# Altium PCB edgy.PcbDoc
Units mm, origin at the board's own origin, x right, y up, seen from the top; angles counter-clockwise.
Board outline 50 x 50 mm, 4 copper layers (Top Layer, Signal Layer 1, Signal Layer 2, Bottom Layer), stack 1.505 mm thick; 76 components, 70 nets, 366 pads, 109 vias.
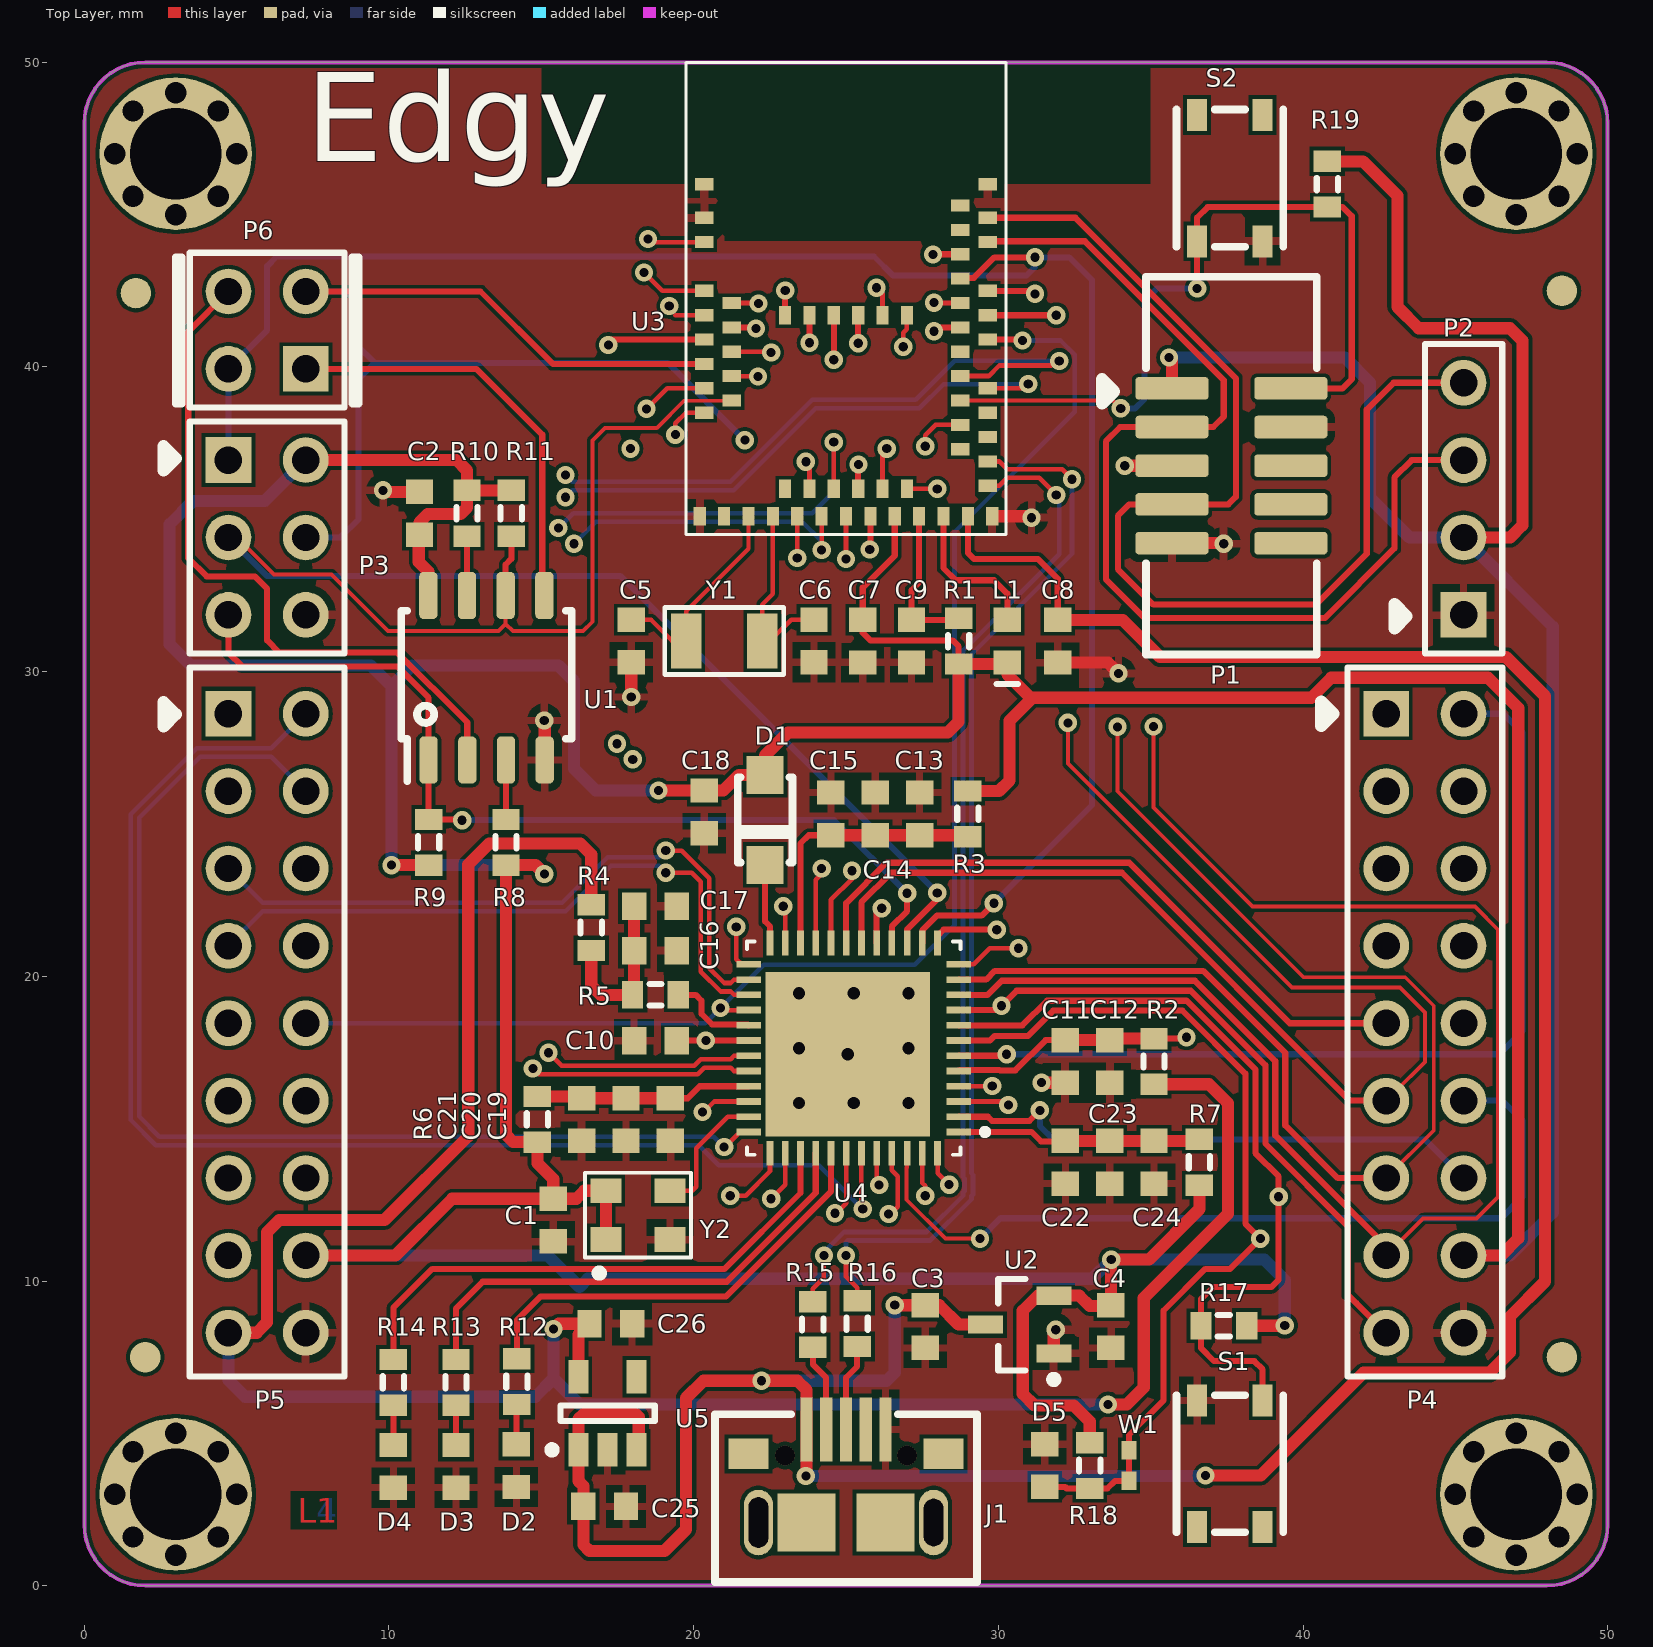
[diagram p0: Top Layer view]
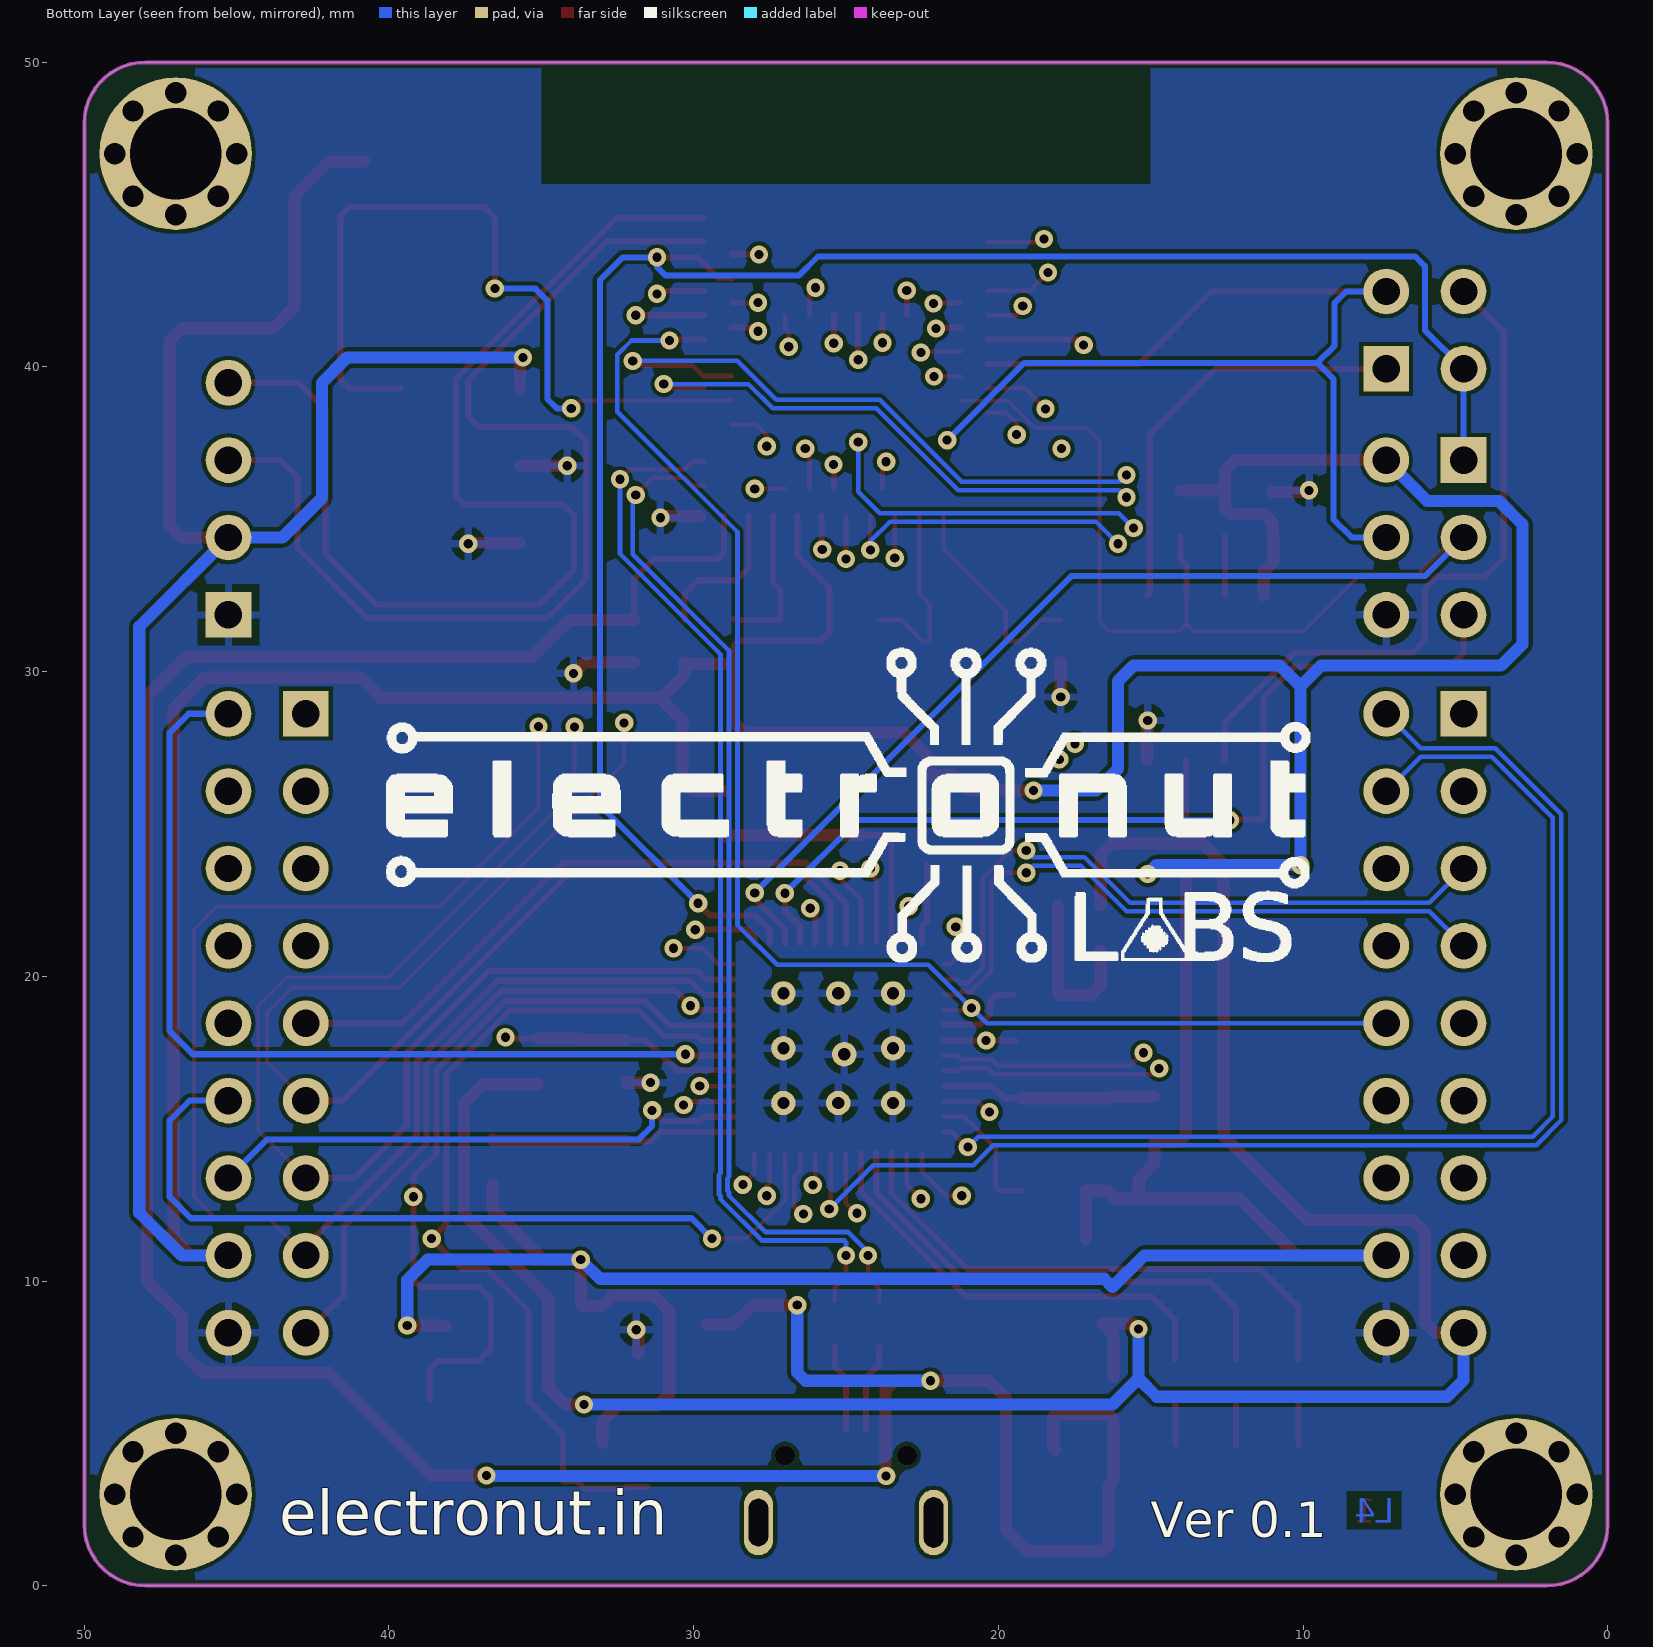
[diagram p1: Bottom Layer view, seen from below]
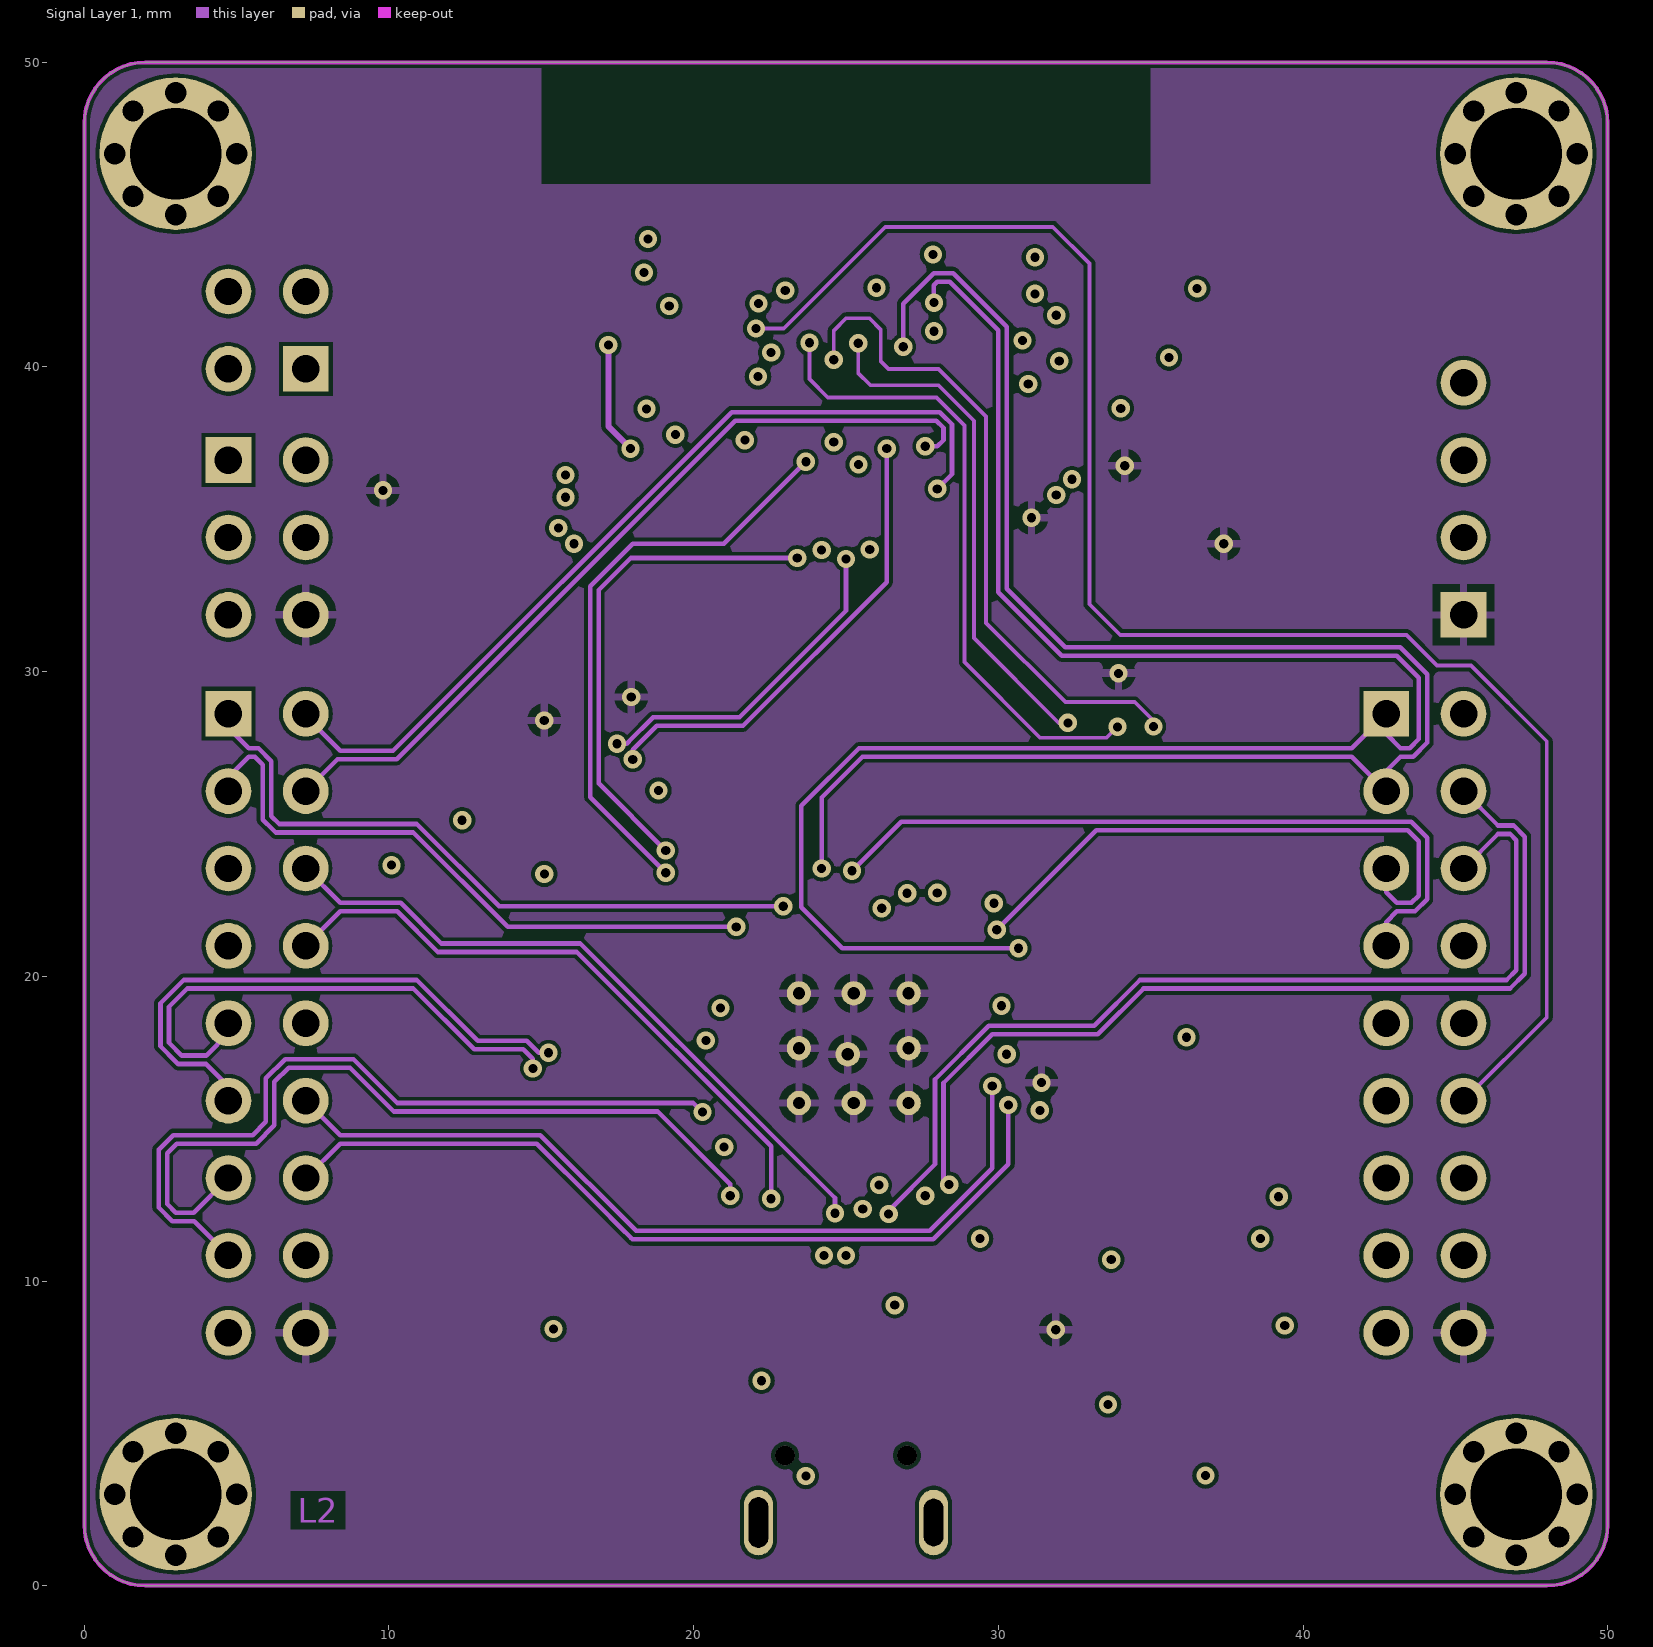
[diagram p2: Signal Layer 1]
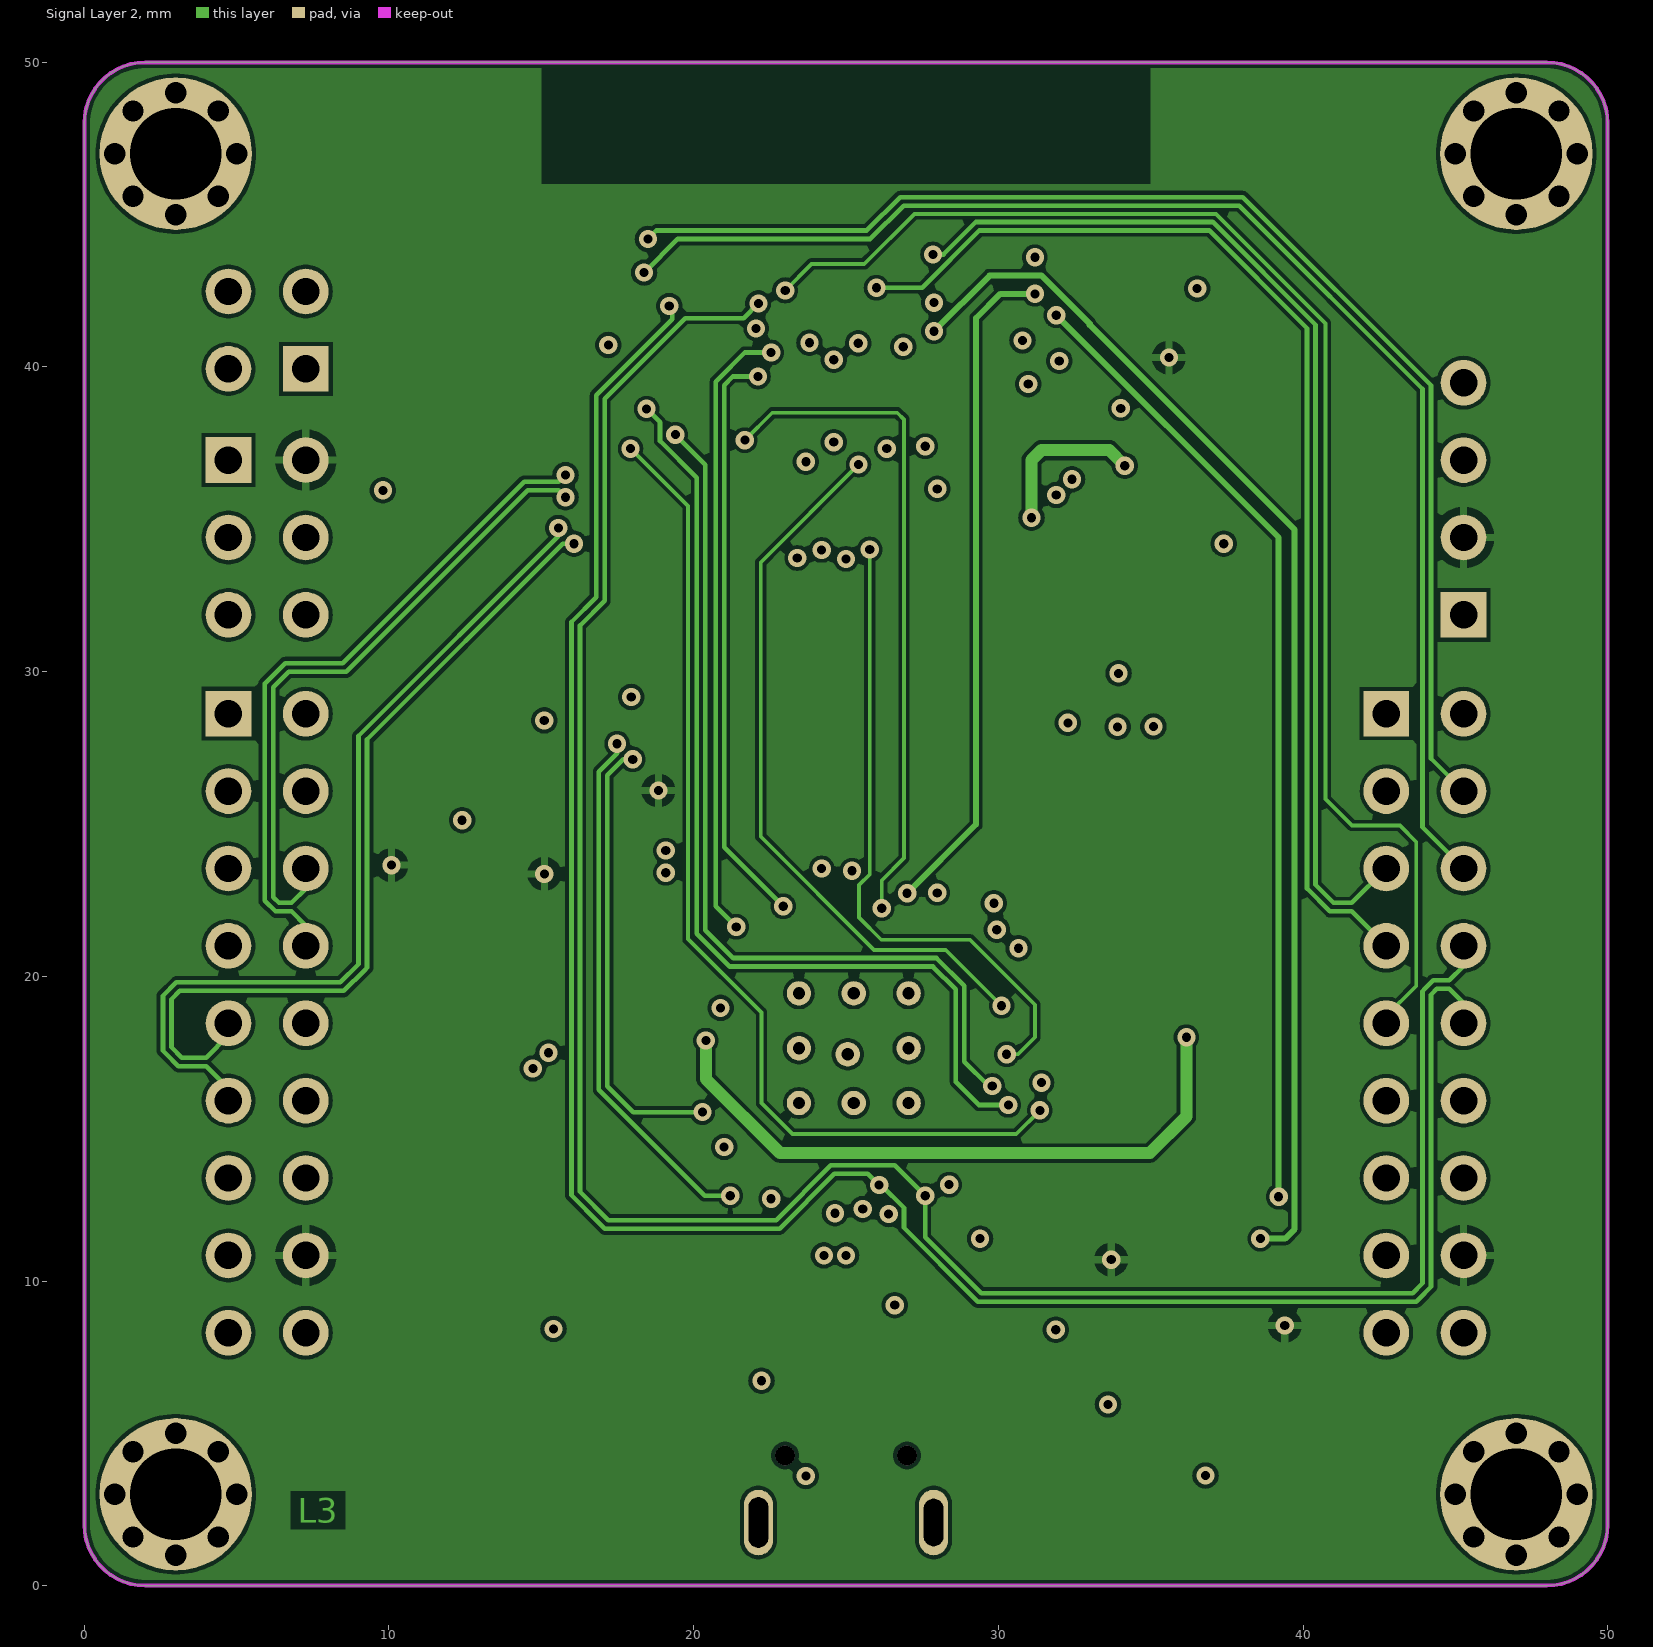
[diagram p3: Signal Layer 2]

## Layer stack, top to bottom
Top Solder: solder mask 0.0475, Solder Resist, Dk 3.5
Top Layer: signal copper 0.0175
Dielectric 1: core 0.1, FR-4, Dk 4.2
Signal Layer 1: signal copper 0.035
Dielectric 3: prepreg 1.2, Dk 4.2
Signal Layer 2: signal copper 0.035
Dielectric 2: core 0.1, Dk 4.2
Bottom Layer: signal copper 0.0175
Bottom Solder: solder mask 0.0475, Solder Resist, Dk 3.5

## Board outline
0,2 0,48 cw(c2,48) 2,50 48,50 cw(c48,48) 50,48 50,2 cw(c48,2) 48,0 2,0 cw(c2,2)

## Design rules (kind name [scope] priority, off if disabled: settings)
Clearance poly_clearance [(InNamedPolygon('TOP_LAYER-GND')) or (InNamedPolygon('BOTTOM_LAYER-GND'))] p1: gap=0.254 ignorepadtopadclearanceinfootprint=FALSE
Clearance Diff_clearance [(InDifferentialPairClass('All Differential Pairs'))] p2: gap=0.127 ignorepadtopadclearanceinfootprint=FALSE
Clearance [All] p3: gap=0.127 ignorepadtopadclearanceinfootprint=FALSE
DiffPairsRouting [InDifferentialPairClass('All Differential Pairs')] p1: maxlimit=0.127 minlimit=0.127 mostfreqgap=0.127 toplayer_minwidth=0.152 toplayer_maxwidth=0.152 toplayer_prefwidth=0.152 midlayer1_minwidth=0.152 midlayer1_maxwidth=0.152 midlayer1_prefwidth=0.152 midlayer2_minwidth=0.152 midlayer2_maxwidth=0.152 midlayer2_prefwidth=0.152 bottomlayer_minwidth=0.152 bottomlayer_maxwidth=0.152 bottomlayer_prefwidth=0.152 maxuncoupledlength=12.7
HoleSize [All] p1: absolutevalues=TRUE maxlimit=5 minlimit=0.025 maxpercent=80.000 minpercent=20.000
MinimumSolderMaskSliver [All] p1: minsoldermaskwidth=0.01
PolygonConnect [All] p1: connectstyle=Relief reliefconductorwidth=0.254 reliefentries=4 polygonreliefangle="90 Angle" airgapwidth=0.254
RoutingVias [All] p1: holewidth=0.3 width=0.6 viastyle="Through Hole" minholewidth=0.3 minwidth=0.6 maxholewidth=0.3 maxwidth=0.6
SilkToSilkClearance [All] p1: silktosilkclearance=0.05
SilkToSolderMaskClearance [IsPad] p1: minsilkscreentomaskgap=0.01 clearancetoexposedcopper=TRUE
SolderMaskExpansion [All] p1: expansion=0.102
Width Diff_pair_width [InNetClass('diff_pair')] p1: maxlimit=0.152 minlimit=0.152 preferedwidth=0.152
Width [All] p2: maxlimit=0.4 minlimit=0.127 preferedwidth=0.2
25 further rules are at their usual default settings.

## Classes and differential pairs
component class Sheet2-edgy: C1 C2 C10 C11 C12 C13 C14 C15 C16 C17 C18 C19 C20 C21 C22 C23 C24 D1 D2 D3 D4 D5 P5 P6 R2 R3 R4 R5 R6 R7 R8 R9 R10 R11 R12 R13 R14 R17 R18 S1 U1 U4 W1 Y2
component class Sheet1-edgy: C3 C4 C5 C6 C7 C8 C9 C25 C26 J1 L1 P1 P2 P3 P4 R1 R15 R16 R19 S2 U2 U3 U5 Y1
differential pair B1-Diff2: +B1-Diff2_P -B1-Diff2_N
differential pair B2-Diff3: +B2-Diff3_P -B2-Diff3_N
differential pair B2-Diff2: +B2-Diff2_P -B2-Diff2_N
differential pair B2-Diff1: +B2-Diff1_P -B2-Diff1_N
differential pair B1-Diff1: +B1-Diff1_P -B1-Diff1_N
differential pair B0-Diff6: +B0-Diff6_P -B0-Diff6_N
differential pair B0-Diff5: +B0-Diff5_P -B0-Diff5_N
differential pair B0-Diff4: +B0-Diff4_P -B0-Diff4_N
differential pair B0-Diff3: +B0-Diff3_P -B0-Diff3_N
differential pair B0-Diff2: +B0-Diff2_P -B0-Diff2_N
differential pair B0-Diff1: +B0-Diff1_P -B0-Diff1_N
differential pair USB: +USB_P -USB_N

## Components (designator, comment, footprint, x,y, rotation, side; value= is the part's Value field where it differs from the comment)
C1 "0.1uF" 1608[0603] 15.388,12 r90 top
C2 "0.1uF" 1608[0603] 11,35.2 r270 top
C3 "1uF" 1608[0603] 27.6,8.504 r90 top
C4 "2.2uF" 1608[0603] 33.694,8.504 r90 top
C5 "12pF" 1608[0603] 17.95,31.006 r90 top
C6 "12pF" 1608[0603] 23.95,31.006 r90 top
C7 "10uF" 1608[0603] 25.55,31 r90 top
C8 "10uF" 1608[0603] 31.95,31 r90 top
C9 "10uF" 1608[0603] 27.15,31 r90 top
C10 "1uF" 1608[0603] 18.744,17.892 r0 top
C11 "0.1uF" 1608[0603] 32.2,17.206 r90 top
C12 "10nF" 1608[0603] 33.654,17.206 r90 top
C13 "1uF" 1608[0603] 27.415,25.332 r270 top
C14 "0.1uF" 1608[0603] 25.96,25.332 r270 top
C15 "10nF" 1608[0603] 24.506,25.332 r270 top
C16 "10uF" 1608[0603] 18.744,20.846 r180 top
C17 "0.1uF" 1608[0603] 18.744,22.301 r180 top
C18 "0.1uF" 1608[0603] 20.344,25.4 r270 top
C19 "1uF" 1608[0603] 19.238,15.298 r90 top
C20 "0.1uF" 1608[0603] 17.779,15.298 r90 top
C21 "10nF" 1608[0603] 16.325,15.298 r90 top
C22 "1uF" 1608[0603] 32.202,13.898 r90 top
C23 "0.1uF" 1608[0603] 33.656,13.898 r90 top
C24 "10nF" 1608[0603] 35.111,13.898 r90 top
C25 "2.2uF" 1608[0603] 17.079,2.6 r180 top
C26 "2.2uF" 1608[0603] 17.279,8.6 r180 top
D1 "MBR130" SOD_123 22.344,25.135 r270 top
D2 "LED1" 1608[0603] 14.182,3.941 r270 top
D3 "LED2" 1608[0603] 12.2,3.919 r270 top
D4 "LED3" 1608[0603] 10.146,3.919 r270 top
D5 "LED4" 1608[0603] 31.523,3.941 r90 top
J1 "Micro_USB" Micro_USB 25,3.598 r0 top
L1 "10uH" INDC1608L 30.296,31 r90 top
P1 "Header 5X2" 2X5_1.27MM_PITCH_HEADER 37.65,36.76 r0 top
P2 "SWD Header" 4pin_2.54mm_header 45.27,35.674 r0 top
P3 "GPIO" "2X9_2.54MM PITCH_HEADER" 6,18.46 r0 top
P4 "GPIO" "2X9_2.54MM PITCH_HEADER" 44,18.46 r0 top
P5 "SPI Prog" 2x3_2.54mm_pitch_header 6,34.404 r0 top
P6 "SPI" 2x2_2.54mm_pitch_header 6,41.209 r180 top
R1 "0R" J1-0603 28.696,31 r270 top
R2 "0R" J1-0603 35.109,17.206 r90 top
R3 "0R" J1-0603 29,25.332 r270 top
R4 "0R" J1-0603 16.64,21.6 r270 top
R5 "100" J1-0603 18.744,19.392 r0 top
R6 "0r" J1-0603 14.87,15.308 r90 top
R7 "0R" J1-0603 36.6,13.898 r90 top
R8 "10K" J1-0603 13.84,24.4 r90 top
R9 "10K" J1-0603 11.3,24.4 r90 top
R10 "10K" J1-0603 12.56,35.2 r270 top
R11 "10K" J1-0603 14.014,35.2 r270 top
R12 "1K" J1-0603 14.2,6.695 r90 top
R13 "1K" J1-0603 12.2,6.673 r90 top
R14 "1K" J1-0603 10.146,6.673 r90 top
R15 "27R" J1-0603 23.911,8.574 r270 top
R16 "27R" J1-0603 25.365,8.6 r270 top
R17 "10K" J1-0603 37.4,8.534 r0 top
R18 "2K2" J1-0603 33,3.941 r270 top
R19 "10K" J1-0603 40.8,46 r90 top
S1 "SW-PB" Tact_Switch 37.6,4 r270 top
S2 "SW-PB" Tact_Switch 37.6,46.2 r90 top
U1 "W25Q_XX" SOIC-8_3.9X4.9MM_PITCH1.27MM 13.2,29.8 r90 top
U2 "MCP1702" SOT-23 30.8,8.6 r180 top
U3 "MODULE_MDBT50" PCB_MDBT50_10.5X15.5 25,40.55 r0 top
U4 "ICE40UP5K-SG48ITR50" *QFN50P700X700X100-49N_ICE40UP5K-SG48ITR50(PRIMARY) 25.256,17.642 r180 top
U5 "MCP1812AT-012/OT" SOT23-5BN 17.174,5.659 r90 top
W1 "Jumper" 0402 34.289,3.941 r270 top
Y1 "32.768kHz" 32.768kHz_crystal 22.25,31.006 r180 top
Y2 "SIT1602AC-12-33E-12.000000E" *OSCDFN320X250X80-4N 18.171,12.164 r0 top
? "Comment" FIDUCIAL-1MM#1 1.5,42.5 r0 top
? "Comment" FIDUCIAL-1MM#2 1.5,7.14 r0 top
? "Comment" FIDUCIAL-1MM#3 48.5,7.5 r0 top
? "Comment" FIDUCIAL-1MM#3 48.5,42.5 r0 top
? "Comment" "MOUNTING_HOLES 3MM" 3,3 r0 top
? "Comment" "MOUNTING_HOLES 3MM" 47,3 r0 top
? "Comment" "MOUNTING_HOLES 3MM" 47,47 r0 top
? "Comment" "MOUNTING_HOLES 3MM" 3,47 r0 top

## Footprints (in the part's own frame and the unit in brackets; to place one, negate y for a bottom-side part, rotate by r counter-clockwise, add the part's x,y. Pads: shape width x height; smd on the part's side, far side on the other; paste and mask are expansions set on the pad)
2x2_2.54mm_pitch_header [mm]
  rect 1.5x1.5 hole 0.9: 1(-1.27,1.27)
  round 1.5 hole 0.9: 2(1.27,1.27) 3(-1.27,-1.27) 4(1.27,-1.27)
  silkscreen extent -2.54,-2.54 2.54,2.54
2x3_2.54mm_pitch_header [mm]
  rect 1.5x1.5 hole 0.9: 1(-1.27,2.54)
  round 1.5 hole 0.9: 2(1.27,2.54) 3(-1.27,0) 4(1.27,0) 5(-1.27,-2.54) 6(1.27,-2.54)
  silkscreen extent -2.54,-3.81 2.54,3.81
2X5_1.27MM_PITCH_HEADER [mm]
  rrect30% 2.4x0.74 smd: 1(-1.95,2.54) 2(-1.95,1.27) 3(-1.95,0) 4(-1.95,-1.27) 5(-1.95,-2.54) 6(1.95,-2.54) 7(1.95,-1.27) 8(1.95,0) 9(1.95,1.27) 10(1.95,2.54)
  silkscreen extent -2.8,-6.2 2.8,6.2, body extent -2.75,-6.33 2.75,6.32, height 5.4
"2X9_2.54MM PITCH_HEADER" [mm]
  rect 1.5x1.5 hole 0.9: 1(-1.27,10.16)
  round 1.5 hole 0.9: 2(1.27,10.16) 3(-1.27,7.62) 4(1.27,7.62) 5(-1.27,5.08) 6(1.27,5.08) 7(-1.27,2.54) 8(1.27,2.54) 9(-1.27,0) 10(1.27,0) 11(-1.27,-2.54) 12(1.27,-2.54) 13(-1.27,-5.08) 14(1.27,-5.08) 15(-1.27,-7.62) 16(1.27,-7.62) 17(-1.27,-10.16) 18(1.27,-10.16)
  silkscreen extent -2.54,-11.6 2.54,11.68, body extent -2.5,-11.68 2.5,11.68, height 8.5
4pin_2.54mm_header [mm]
  rect 1.5x1.5 hole 0.9: 1(0,-3.81)
  round 1.5 hole 0.9: 2(0,-1.27) 3(0,1.27) 4(0,3.81)
  silkscreen extent -1.27,-5.08 1.27,5.08
32.768kHz_crystal [mm]
  rect 1x1.8 smd: 1(0,0) 2(2.5,0)
  silkscreen extent -0.7,-1.1 3.2,1.1, body extent -0.2,-0.7 2.7,0.7, height 0.25
0402 [mm] "Chip Capacitor, Body 1.0x0.5mm, IPC High Density"
  rect 0.6x0.5 smd: 1(-0.5,0) 2(0.5,0)
  body extent -0.55,-0.3 0.55,0.3, height 1.3
1608[0603] [mm] "Chip Capacitor, Body 1.6x0.8mm, IPC High Density"
  rect 0.8x0.9 smd: 1(-0.7,0) 2(0.7,0)
  body extent -0.87,-0.48 0.87,0.48, height 1.3
*OSCDFN320X250X80-4N [mm]
  rect 1.01x0.81 smd: 1(-1.05,-0.8) 2(1.05,-0.8) 3(1.05,0.8) 4(-1.05,0.8)
  silkscreen extent -1.74,-1.95 1.74,1.39, body extent -1.5,-1 1.5,1, height 0.75
*QFN50P700X700X100-49N_ICE40UP5K-SG48ITR50(PRIMARY) [mm]
  rect 0.81x0.22 smd: 1(-3.45,2.75) 2(-3.45,2.25) 3(-3.45,1.75) 4(-3.45,1.25) 5(-3.45,0.75) 6(-3.45,0.25) 7(-3.45,-0.25) 8(-3.45,-0.75) 9(-3.45,-1.25) 10(-3.45,-1.75) 11(-3.45,-2.25) 12(-3.45,-2.75) 25(3.45,-2.75) 26(3.45,-2.25) 27(3.45,-1.75) 28(3.45,-1.25) 29(3.45,-0.75) 30(3.45,-0.25) 31(3.45,0.25) 32(3.45,0.75) 33(3.45,1.25) 34(3.45,1.75) 35(3.45,2.25) 36(3.45,2.75)
  rect 0.22x0.81 smd: 13(-2.75,-3.45) 14(-2.25,-3.45) 15(-1.75,-3.45) 16(-1.25,-3.45) 17(-0.75,-3.45) 18(-0.25,-3.45) 19(0.25,-3.45) 20(0.75,-3.45) 21(1.25,-3.45) 22(1.75,-3.45) 23(2.25,-3.45) 24(2.75,-3.45) 37(2.75,3.45) 38(2.25,3.45) 39(1.75,3.45) 40(1.25,3.45) 41(0.75,3.45) 42(0.25,3.45) 43(-0.25,3.45) 44(-0.75,3.45) 45(-1.25,3.45) 46(-1.75,3.45) 47(-2.25,3.45) 48(-2.75,3.45)
  round 0.8 hole 0.4: EP(-1.8,1.8) EP(-1.8,0) EP(-1.8,-1.8) EP(0,1.8) EP(0,-1.8) EP(0.2,0.2) EP(1.8,1.8) EP(1.8,0) EP(1.8,-1.8)
  rect 5.4x5.4 smd: EP(0.2,0.2)
  silkscreen extent -4.41,-3.5 3.5,3.5, body extent -3.5,-3.5 3.5,3.5, height 1
FIDUCIAL-1MM#1 [mm] "1MM FIDUCAL MARKER"
  round 1 smd paste+0 mask+0.5: 1(0.193,-0.073)
FIDUCIAL-1MM#2 [mm] "1MM FIDUCAL MARKER"
  round 1 smd paste+0 mask+0.5: 1(0.5,0.36)
FIDUCIAL-1MM#3 [mm] "1MM FIDUCAL MARKER"
  round 1 smd paste+0 mask+0.5: 1(0,0)
INDC1608L [mm] "Chip Inductor, Body 1.6x0.8mm, IPC High Density"
  rect 0.8x0.9 smd: 1(-0.7,0) 2(0.7,0)
  silkscreen extent -1.4,-0.35 -1.4,0.35, body extent -0.87,-0.48 0.87,0.48, height 0.55
J1-0603 [mm] "Chip Resistor, Body 1.6x0.8mm, IPC High Density"
  rect 0.7x0.9 smd: 1(-0.75,0) 2(0.75,0)
  silkscreen extent -0.2,-0.35 0.2,0.35, body extent -0.85,-0.48 0.85,0.48, height 0.9
Micro_USB [mm]
  rect 0.4x2.1 smd: 1(-1.3,1.525) 2(-0.65,1.525) 3(0,1.525) 4(0.65,1.525) 5(1.3,1.525)
  rect 1.3x1 smd: ""(-3.2,0.725) ""(3.2,0.725)
  oval 0.95x2.15 hole 0.65 slot 1.65 at 90 deg: ""(-2.875,-1.525)
  round 0.65 hole 0.65: ""(-2,0.675) ""(2,0.675)
  rect 1.9x1.9 smd: ""(-1.3,-1.525) ""(1.3,-1.525)
  oval 0.95x2.15 hole 0.65 slot 1.55 at 90 deg: ""(2.875,-1.525)
  silkscreen extent -4.3,-3.47 4.3,2.02, body extent -4.02,-3.38 4.02,2.43, height 17
"MOUNTING_HOLES 3MM" [mm]
  round 1 hole 0.7: ""(-2,0) ""(-1.4,-1.4) ""(-1.4,1.4) ""(0,-2) ""(0,2) ""(1.4,-1.4) ""(1.4,1.4) ""(2,0)
  round 5 hole 3: ""(0,0)
PCB_MDBT50_10.5X15.5 [mm]
  rect 0.6x0.4 smd mask+0.05: 1(-4.65,5.45) 2(-4.65,4.35) 3(-4.65,3.55) 4(-4.65,1.95) 5(-3.75,1.55) 6(-4.65,1.15) 7(-3.75,0.75) 8(-4.65,0.35) 9(-3.75,-0.05) 10(-4.65,-0.45) 11(-3.75,-0.85) 12(-4.65,-1.25) 13(-3.75,-1.65) 14(-4.65,-2.05) 34(4.65,-4.45) 35(4.65,-3.65) 36(3.75,-3.25) 37(4.65,-2.85) 38(3.75,-2.45) 39(4.65,-2.05) 40(3.75,-1.65) 41(4.65,-1.25) 42(3.75,-0.85) 43(3.75,-0.05) 44(4.65,0.35) 45(3.75,0.75) 46(4.65,1.15) 47(3.75,1.55) 48(4.65,1.95) 49(3.75,2.35) 50(3.75,3.15) 51(4.65,3.55) 52(3.75,3.95) 53(4.65,4.35) 54(3.75,4.75) 55(4.65,5.45)
  rect 0.4x0.6 smd mask+0.05: 15(-4.8,-5.45) 16(-4,-5.45) 17(-3.2,-5.45) 18(-2.4,-5.45) 19(-2,-4.55) 20(-1.6,-5.45) 21(-1.2,-4.55) 22(-0.8,-5.45) 23(-0.4,-4.55) 24(0,-5.45) 25(0.4,-4.55) 26(0.8,-5.45) 27(1.2,-4.55) 28(1.6,-5.45) 29(2,-4.55) 30(2.4,-5.45) 31(3.2,-5.45) 32(4,-5.45) 33(4.8,-5.45) 56(-2,1.15) 57(-1.2,1.15) 58(-0.4,1.15) 59(0.4,1.15) 60(1.2,1.15) 61(2,1.15)
  silkscreen extent -5.25,-6.05 5.25,9.45, body extent -5.25,-6.05 5.25,9.45, height 2.05
SOD_123 [mm]
  rect 1.25x1.22 smd: 1(-1.475,0) 2(1.475,0)
  silkscreen extent -1.4,-0.9 1.4,0.9, body extent -1.93,-1.05 1.93,1.1, height 1.35
SOIC-8_3.9X4.9MM_PITCH1.27MM [mm]
  rrect50% 1.55x0.6 smd: 1(-2.7,1.9) 2(-2.7,0.63) 3(-2.7,-0.64) 4(-2.7,-1.91) 5(2.7,-1.9) 6(2.7,-0.63) 7(2.7,0.64) 8(2.7,1.91)
  silkscreen extent -3.4,-2.8 2.2,2.8, body extent -3.08,-2.6 3.08,2.4, height 2
SOT23-5BN [mm] "SOT23, 5-Leads, Body 2.9x1.6mm, Pitch 0.95mm, Lead Span 2.8mm, IPC Medium Density"
  rect 1.1x0.65 smd: 1(-1.2,0.95) 2(-1.2,0) 3(-1.2,-0.95) 4(1.2,-0.95) 5(1.2,0.95)
  silkscreen extent -1.32,-1.55 0.25,1.95, body extent -0.9,-1.55 0.9,1.55, height 1.19
SOT-23 [mm]
  rect 1.15x0.6 smd: 1(-1.021,0.981) 2(-1.021,-0.919) 3(1.229,0.031)
  silkscreen extent -1.15,-1.47 0.8,1.96, body extent -0.6,-1.47 0.8,1.53, height 1.1
Tact_Switch [mm]
  rect 1.05x0.65 smd: 1(-2.075,1.075) 2(-2.075,-1.075) ""(2.075,1.075) ""(2.075,-1.075)
  silkscreen extent -2.25,-1.75 2.25,1.75, body extent -2.55,-1.62 2.55,1.63, height 2.4

## Part data
C1 C2 C3 C4 C5 C6 C7 C8 C9 C10 C11 C12 C13 C14 C15 C16 C17 C18 C19 C20 C21 C22 C23 C24 C25 C26: library part "Cap Semi", "Capacitor (Semiconductor SIM Model)", LatestRevisionDate=29-May-2009, LatestRevisionNote="IPC-7351 Footprint Added.", PackageDescription="Chip Capacitor", PackageReference=C1206, Published=8-Jun-2000, Publisher="Altium Limited"
D1: library part Diode, "Default Diode", Code_JEDEC=DO-214-AB, LatestRevisionDate=17-Jul-2002, LatestRevisionNote="Re-released for DXP Platform.", PackageDescription="DO-214-AB/SMC; 2 C-Bend Leads; Body 7.9 x 5.9 mm, inc. leads (LxW)", PackageReference=SMC, PackageVersion=Sep-1996, Published=8-Jun-2000, Publisher="Altium Limited"
D2 D3 D5: library part LED3, "Typical BLUE SiC LED", DatasheetVersion=16-Apr-2002, LatestRevisionDate=17-Dec-2003, LatestRevisionNote="PCB Footprint replaced.", PackageDescription="SM LED; 2 C-Bend Leads; Body 3.5 x 2.8 x 1.9 mm, inc leads (LxWxH typ)", PackageReference=3.5X2.8X1.9, PackageVersion=16-Apr-2002, Published=8-Jun-2000, Publisher="Altium Limited"
D4: "Typical BLUE SiC LED", DatasheetVersion=16-Apr-2002, LatestRevisionDate=17-Dec-2003, LatestRevisionNote="PCB Footprint replaced.", PackageDescription="SM LED; 2 C-Bend Leads; Body 3.5 x 2.8 x 1.9 mm, inc leads (LxWxH typ)", PackageReference=3.5X2.8X1.9, PackageVersion=16-Apr-2002, Published=8-Jun-2000, Publisher="Altium Limited"
J1: "Micro USB 2.0"
L1: library part Inductor, "Inductor", Code_IEC=1005, Code_JEITA=0402, LatestRevisionDate=29-May-2009, LatestRevisionNote="IPC-7351 Footprint Added.", PackageDescription="Chip Inductor", PackageReference=0402-A, Published=8-Jun-2000, Publisher="Altium Limited"
P1: "Header, 5-Pin, Dual row", LatestRevisionDate=17-Jul-2002, LatestRevisionNote="Re-released for DXP Platform.", Publisher="Altium Limited"
P2: library part "Header 4", "Header, 4-Pin", LatestRevisionDate=17-Jul-2002, LatestRevisionNote="Re-released for DXP Platform.", Publisher="Altium Limited"
P3 P4: library part "Header 9X2", "Header, 9-Pin, Dual row", LatestRevisionDate=17-Jul-2002, LatestRevisionNote="Re-released for DXP Platform.", Publisher="Altium Limited"
P5: library part "Header 3X2", "Header, 3-Pin, Dual row", LatestRevisionDate=17-Jul-2002, LatestRevisionNote="Re-released for DXP Platform.", Publisher="Altium Limited"
P6: library part "Header 2X2", "Header, 2-Pin, Dual row", LatestRevisionDate=17-Jul-2002, LatestRevisionNote="Re-released for DXP Platform.", Publisher="Altium Limited"
R1 R2 R3 R4 R5 R6 R7 R8 R9 R10 R11 R12 R13 R14 R15 R16 R17 R18 R19: library part Res3, "Resistor", LatestRevisionDate=29-May-2009, LatestRevisionNote="IPC-7351 Footprint Added.", PackageDescription="Chip Resistor", PackageReference=J1-0603, Published=8-Jun-2000, Publisher="Altium Limited"
S1 S2: "Switch", LatestRevisionDate=17-Jul-2002, LatestRevisionNote="Re-released for DXP Platform.", PackageDescription="Switch; 2 Leads", PackageReference=SPST-2, Published=24-Mar-1999, Publisher="Altium Limited"
U2: "3.3 V Low Quasient Current LDO"
U3: "MDBT50"
U4: "iCE40 UltraPlus 5280 LUTs 39 I/O 1.2 V Surface Mount FOPGA - QFN-48", Package="QFN-48 Lattice Semiconductor", Digi-Key_Part_Number=220-2145-1-ND, Digi-Key_Purchase_URL=https://www.digikey.in/product-detail/en/lattice-semiconductor-corporation/ICE40UP5K-SG48ITR50/220-2145-1-ND/7688199?utm_source=snapeda&utm_medium=aggregator&utm_campaign=symbol, MF="Lattice Semiconductor", MP=ICE40UP5K-SG48ITR50, SnapEDA_Link=https://www.snapeda.com/parts/ICE40UP5K-SG48ITR50/Lattice%20Semiconductor%20Corporation/view-part/?ref=snap
U5: Manufacturer=Microchip, Supplier Part Number 1=579-MCP1812AT-012/OT, Manufacturer Part Number=MCP1812AT-012/OT, Pricing 1="1=0.4, 10=0.395, 50=0.329, 100=0.298, 1000=0.298, 10000=0.298 (USD)", Stock 1=2995, Supplier 1=Mouser
W1: "Jumper Wire", LatestRevisionDate=17-Jul-2002, LatestRevisionNote="Re-released for DXP Platform.", PackageDescription="Radial Cap, Thru-Hole; 2 Leads; 0.2 in Pin Spacing", PackageReference=RAD-0.2, Published=24-Mar-1999, Publisher="Altium Limited"
Y1: library part XTAL, "Crystal Oscillator", LatestRevisionDate=17-Jul-2002, LatestRevisionNote="Re-released for DXP Platform.", PackageDescription="Crystal, Thru-Hole; 2 Leads; Body 3.1 x 8.2 mm (Dia.xH)", PackageReference=R38, Published=8-Jun-2000, Publisher="Altium Limited"
Y2: Case/Package=SMD/SMT, Manufacturer=SiTime, Supplier Part Number 1=SIT1602AC-12-33E-12.000000E-ND, Height=0.032inch, Length=0.098inch, Manufacturer Part Number=SIT1602AC-12-33E-12.000000E, Mount="Surface Mount", Packaging="Tape and Reel", Pricing 1="1000=0.63648 (USD)", Stock 1=0, Supplier 1=Digi-Key, Width=0.079inch

## Via types
v1: diameter 0.6, hole 0.3, Top Layer to Bottom Layer, tented both sides, 109 vias

## Nets (pads, with @x,y where several pads share a name; then routed paths per layer and width w, separated by ;. In a path a pad name is that pad's centre, name@x,y a point inside that pad or via, vN(x,y) a via of type N, cw(c..) or ccw(c..) an arc to the next point about the centre after c; other vN are vias at no path point)
+1.2V: C26.2 P3.17 R2.1 R4.1 U5.5 | length 77.9
  Top Layer w0.4: P3.17 5.656,8.3 6,8.644 6,11.6 6.4,12 9.85,12 12.6,14.75 12.6,23.672 13.289,24.361 16.278,24.361 16.64,24 R4.1 ; v1(15.4,8.427) 15.573,8.6 C26.2 16.224,8.245 U5.5 ; v1(33.6,5.948) 34.216,5.948 34.773,6.505 34.773,9.444 37.534,12.205 37.534,15.833 36.911,16.456 R2.1
  Bottom Layer w0.4: P3.17 4.73,6.742 5.272,6.2 14.8,6.2 15.4,6.8 ; v1(15.4,8.427) 15.4,6.8 ; v1(33.6,5.948) 16.252,5.948 15.4,6.8
+3.3V: C1.2 C2.2 C4.2 C7.2 C18.1 D1.1 L1.1 P1.1 P2.2 P3.16 P4.16 P5.2 R1.2 R3.1 R6.1 R7.1 R8.1 R9.1 R10.1 R11.1 R17.2 R18.1 R19.2 U1.8 U2.2 U3.28 Y2.1 Y2.4 | length 257.4
  Top Layer w0.2: U3.28 26.6,33.811 25.55,32.761 C7.2 25.55,31.277 25.8,31.027 28.5,31.027 28.696,30.831 R1.2
  Top Layer w0.4: P3.16 10.213,10.84 12.073,12.7 C1.2 ; P5.2 12.221,36.944 12.56,36.605 R10.1 ; v1(10.082,23.65) R9.1 ; U1.8 11.29,33.287 10.977,33.6 10.977,34.477 C2.2 11,34.9 11.273,35.173 12.35,35.173 12.56,35.383 R10.1 ; R11.1 R10.1 ; v1(15.1,23.361) 14.811,23.65 R8.1 13.84,14.799 14.081,14.558 R6.1 14.87,13.863 15.388,13.345 C1.2 ; Y2.1 Y2.4 16.41,12.964 16.146,12.7 C1.2 ; v1(18.843,26.1) C18.1 20.974,26.1 21.484,26.61 D1.1 22.344,27.247 23.097,28 28.339,28 28.696,28.356 R1.2 30.246,30.25 L1.1 30.296,29.904 31.056,29.143 ; R3.1 30.022,26.082 30.363,26.423 30.363,28.39 31.087,29.113 31.056,29.143 ; R18.1 33,5.385 32.473,5.912 31.185,5.912 30.8,6.297 30.8,9.022 31.297,9.519 U2.2 32.659,9.519 33,9.178 33.667,9.178 C4.2 33.694,10.691 v1(33.704,10.701) 34.941,10.701 36.6,12.36 R7.1 ; v1(35.6,40.309) 35.7,40.209 P1.1 ; R17.2 39.396,8.534 v1(39.4,8.538) ; R19.2 41.97,46.75 43.101,45.619 43.101,41.972 43.8,41.273 46.798,41.273 47.2,40.871 47.2,34.804 46.8,34.404 P2.2 ; P4.16 46.507,10.84 47.067,11.4 47.067,28.806 46.073,29.8 40.925,29.8 40.268,29.143 31.056,29.143
  Bottom Layer w0.4: P3.16 15.212,10.84 16.252,9.8 16.526,10.074 33.077,10.074 v1(33.704,10.701) 38.733,10.701 39.4,10.033 v1(39.4,8.538) ; P5.2 5.926,35.6 3.564,35.6 2.8,34.836 2.8,30.892 3.492,30.2 9.4,30.2 10.082,29.518 ; v1(15.1,23.361) 14.811,23.65 v1(10.082,23.65) 10.082,29.518 ; v1(18.843,26.1) 16.788,26.1 16.072,26.815 16.072,29.694 15.567,30.2 10.763,30.2 10.082,29.518 ; v1(35.6,40.309) 41.375,40.309 42.2,39.484 42.2,35.7 43.496,34.404 P2.2 48.2,31.474 48.2,12.242 46.798,10.84 P4.16
\H\O\L\D\: R10.2 U1.7 | length 1.9
  Top Layer w0.2: U1.7 R10.2
\W\P\: R8.2 U1.3 | length 1.9
  Top Layer w0.2: R8.2 U1.3
B0-Diff1_N: P3.1 U3.11 U4.23 | length 43.4
  Top Layer w0.152: U3.11 22.099,39.7 v1(22.112,39.687) ; v1(22.941,22.301) 23.006,22.235 U4.23
  Signal Layer 1 w0.152: P3.1 4.73,28.159 5.4,27.49 5.716,27.49 6.14,27.066 6.14,25.26 6.4,25 10.913,25 13.613,22.301 v1(22.941,22.301)
  Signal Layer 2 w0.152: v1(22.112,39.687) 21.287,39.687 21,39.4 21,24.241 v1(22.941,22.301)
B0-Diff1_P: P3.3 U3.9 U4.25 | length 44
  Top Layer w0.152: U3.9 22.519,40.5 v1(22.544,40.475) ; v1(21.4,21.624) 21.4,20.565 21.573,20.392 U4.25
  Signal Layer 1 w0.152: P3.3 4.73,26.541 5.4,27.21 5.6,27.21 5.861,26.95 5.861,25.145 6.203,24.803 6.284,24.721 10.798,24.721 13.895,21.624 v1(21.4,21.624)
  Signal Layer 2 w0.152: v1(21.4,21.624) 20.721,22.303 20.721,39.516 20.803,39.597 21.681,40.475 v1(22.544,40.475)
B0-Diff2_N: P3.5 U3.20 U4.26 | length 39.6
  Top Layer w0.152: v1(19.086,24.127) 19.603,24.127 20.513,23.217 20.513,20.268 21,19.782 21.215,19.782 21.325,19.892 U4.26 ; v1(23.4,33.73) U3.20
  Signal Layer 1 w0.152: v1(19.086,24.127) 16.882,26.331 16.882,32.682 17.93,33.73 v1(23.4,33.73)
  Bottom Layer w0.152: P3.5 5.861,22.41 15.677,22.41 17.171,23.903 18.862,23.903 v1(19.086,24.127)
B0-Diff2_P: P3.7 U3.21 U4.27 | length 42
  Top Layer w0.152: v1(19.086,23.4) 19.936,23.4 20.234,23.101 20.234,20.153 20.884,19.503 21.215,19.503 21.325,19.392 U4.27 ; v1(23.683,36.889) 23.701,36.889 23.8,36.988 U3.21
  Signal Layer 1 w0.152: v1(19.086,23.4) 16.603,25.883 16.603,32.797 16.684,32.879 18.005,34.2 20.994,34.2 v1(23.683,36.889)
  Bottom Layer w0.152: P3.7 5.861,22.13 15.793,22.13 17.286,23.624 18.862,23.624 v1(19.086,23.4)
B0-Diff3_N: P3.9 U3.22 U4.32 | length 62.9
  Top Layer w0.152: v1(14.722,16.977) 14.915,16.784 20.131,16.784 20.35,17.003 21.215,17.003 21.325,16.892 U4.32 ; v1(24.2,33.995) U3.22
  Signal Layer 1 w0.152: P3.9 4.73,18.13 4,17.4 3.2,17.4 2.779,17.821 2.779,19 3.379,19.6 10.8,19.6 12.792,17.608 14.408,17.608 14.722,17.293 v1(14.722,16.977)
  Signal Layer 2 w0.152: P3.9 4.73,18.06 4,17.33 3.204,17.33 2.862,17.671 2.862,19.246 3.138,19.521 8.516,19.521 9.197,20.203 9.279,20.284 9.279,27.773 15.706,34.2 v1(16.072,34.2)
  Bottom Layer w0.152: v1(16.072,34.2) 16.793,34.921 23.557,34.921 24.2,34.278 v1(24.2,33.995)
B0-Diff3_P: P3.11 U3.23 U4.31 | length 67
  Top Layer w0.152: v1(15.236,17.491) 15.664,17.063 20.016,17.063 20.234,17.282 21.215,17.282 21.325,17.392 U4.31 ; U3.23 v1(24.6,37.534)
  Signal Layer 1 w0.152: P3.11 4.73,16.391 4,17.121 3.084,17.121 3.003,17.203 2.5,17.705 2.5,19.116 3.263,19.879 3.379,19.879 3.484,19.879 10.916,19.879 12.908,17.887 14.523,17.887 14.605,17.805 14.919,17.491 v1(15.236,17.491)
  Signal Layer 2 w0.152: P3.11 4.73,16.32 4,17.05 3.088,17.05 2.665,17.474 2.583,17.555 2.583,19.362 3.022,19.8 8.4,19.8 9,20.4 9,27.889 15.558,34.447 v1(15.558,34.714)
  Bottom Layer w0.152: v1(15.558,34.714) 16.044,35.2 23.897,35.2 24.6,35.903 v1(24.6,37.534)
B0-Diff4_N: P3.13 U3.24 U4.37 | length 58.7
  Top Layer w0.152: v1(21.2,12.8) 21.705,12.8 22.506,13.601 U4.37 ; v1(25,33.7) U3.24
  Signal Layer 1 w0.152: P3.13 3.588,12.238 3.007,12.238 2.717,12.528 2.717,14.199 3.029,14.511 5.637,14.511 6.24,15.113 6.24,16.534 6.706,17 8.72,17 10.157,15.563 18.819,15.563 21.2,13.182 v1(21.2,12.8) ; v1(17.486,27.635) 17.803,27.635 17.86,27.693 18.667,28.499 21.505,28.499 25,31.995 v1(25,33.7)
  Signal Layer 2 w0.152: v1(17.486,27.635) 17.486,27.318 16.887,26.72 16.887,16.276 20.363,12.8 v1(21.2,12.8)
B0-Diff4_P: P3.15 U3.27 U4.34 | length 58.7
  Top Layer w0.152: v1(20.288,15.544) 20.324,15.544 20.672,15.892 U4.34 ; U3.27 26.2,37.273 26.247,37.32 v1(26.339,37.32)
  Signal Layer 1 w0.152: P3.15@4.73,10.9 P3.15 3.611,11.959 2.891,11.959 2.438,12.412 2.438,14.314 2.913,14.79 5.521,14.79 5.961,15.229 5.961,16.649 6.59,17.279 8.836,17.279 10.273,15.842 19.99,15.842 v1(20.288,15.544) ; v1(18,27.121) 18,27.438 18.782,28.22 21.62,28.22 26.339,32.939 v1(26.339,37.32)
  Signal Layer 2 w0.152: v1(18,27.121) 17.683,27.121 17.166,26.604 17.166,16.392 18.014,15.544 v1(20.288,15.544)
B0-Diff5_N: P3.2 U3.29 U4.43 | length 74.1
  Top Layer w0.152: U4.43 25.506,12.405 v1(25.55,12.361) ; U3.29 v1(27.995,36)
  Signal Layer 1 w0.152: P3.2 7.27,28.531 8.401,27.4 10.132,27.4 21.166,38.434 21.248,38.516 28.079,38.516 28.161,38.434 28.479,38.116 28.479,36.484 v1(27.995,36)
  Bottom Layer w0.152: P3.2 6.14,27.49 3.684,27.49 1.521,25.326 1.521,15.284 2.346,14.459 20.168,14.459 20.632,13.995 20.827,13.8 24.111,13.8 v1(25.55,12.361)
B0-Diff5_P: P3.4 U3.38 U4.36 | length 66
  Top Layer w0.152: v1(21,14.4) 21.037,14.4 21.529,14.892 U4.36 ; v1(27.6,37.4) 27.6,37.761 27.939,38.1 U3.38
  Signal Layer 1 w0.152: P3.4 8.311,27.121 10.248,27.121 21.363,38.237 27.963,38.237 28.2,38 28.2,37.6 28,37.4 v1(27.6,37.4)
  Bottom Layer w0.152: P3.4 6.14,27.21 3.8,27.21 1.8,25.21 1.8,15.4 2.462,14.738 20.662,14.738 v1(21,14.4)
B0-Diff6_N: P3.6 U3.41 U4.42 | length 63.9
  Top Layer w0.152: v1(24.638,12.225) 24.676,12.225 25.006,12.555 U4.42 ; U3.41 30.844,39.3 v1(30.983,39.439)
  Signal Layer 1 w0.152: P3.6 8.401,22.41 10.388,22.41 11.719,21.079 16.282,21.079 24.638,12.723 v1(24.638,12.225)
  Signal Layer 2 w0.152: P3.6 7.27,22.88 6.8,22.41 6.391,22.41 6.2,22.6 6.2,29.494 6.706,30 8.6,30 14.55,35.95 15.569,35.95 v1(15.793,35.726)
  Bottom Layer w0.152: v1(15.793,35.726) 16.017,35.95 21.316,35.95 24.01,38.644 27.405,38.644 28.199,39.439 v1(30.983,39.439)
B0-Diff6_P: P3.8 U3.42 U4.38 | length 65.9
  Top Layer w0.152: v1(22.544,12.7) 23.006,13.162 U4.38 ; U3.42 28.75,39.703 29.69,39.703 30.036,40.048 31.738,40.048 31.889,40.2 v1(32,40.2)
  Signal Layer 1 w0.152: P3.8 8.401,22.13 10.273,22.13 11.603,20.8 16.167,20.8 22.544,14.423 v1(22.544,12.7)
  Signal Layer 2 w0.152: P3.8 7.27,21.66 6.8,22.13 6.275,22.13 5.921,22.484 5.921,29.61 6.508,30.197 6.59,30.279 8.484,30.279 14.434,36.229 15.569,36.229 v1(15.793,36.453)
  Bottom Layer w0.152: v1(15.793,36.453) 16.017,36.229 21.2,36.229 23.895,38.923 27.289,38.923 28.566,40.2 v1(32,40.2)
B1-Diff1_N: P4.5 U3.50 U4.13 | length 58.4
  Top Layer w0.2: v1(27.854,43.694) 27.86,43.7 U3.50 ; U4.13 28.006,21.337 28.2,21.531 v1(29.95,21.531)
  Signal Layer 1 w0.152: v1(29.95,21.531) 33.215,24.796 43.437,24.796 43.8,24.433 43.8,22.65 43.56,22.41 43.079,22.41 42.73,22.759 P4.5
  Signal Layer 2 w0.152: v1@27.811,43.597 v1@27.908,43.694 ; v1(27.854,43.694) v1@27.908,43.694 ; P4.5 41.6,22.41 41,22.41 40.41,23 40.41,41.385 37.034,44.761 29.266,44.761 28.2,43.694 v1@27.908,43.694
B1-Diff1_P: P4.7 U3.60 U4.20 | length 65.9
  Top Layer w0.152: U4.20 24.506,22.511 25.2,23.205 v1(25.2,23.463) ; v1(26,42.6) 26.2,42.4 U3.60
  Signal Layer 1 w0.152: v1(25.2,23.463) 26.812,25.075 43.553,25.075 43.635,24.993 44.079,24.549 44.079,22.534 43.675,22.13 43.079,22.13 42.73,21.781 P4.7
  Signal Layer 2 w0.152: v1(26,42.6) 27.5,42.6 29.382,44.482 36.918,44.482 40.13,41.27 40.13,22.884 40.884,22.13 41.6,22.13 P4.7
B1-Diff2_N: P4.1 U3.47 U4.12 | length 65.5
  Top Layer w0.152: v1(27.885,42.113) 27.899,42.1 U3.47 ; U4.12 29.192,20.392 29.723,20.923 v1(30.664,20.923)
  Signal Layer 1 w0.152: v1(27.885,42.113) 27.885,42.685 28,42.8 28.4,42.8 30,41.2 30,32.605 32.003,30.603 32.084,30.521 43.079,30.521 43.8,29.8 43.8,27.789 43.5,27.49 43.2,27.49 42.73,27.959 P4.1 41.6,27.49 25.426,27.49 23.537,25.6 23.537,22.263 24.877,20.923 v1(30.664,20.923)
B1-Diff2_P: P4.3 U3.61 U4.21 | length 59.6
  Top Layer w0.152: U4.21 24.006,23.167 24.2,23.361 v1(24.2,23.54) ; v1(26.879,40.665) 26.879,41.122 27,41.243 U3.61
  Signal Layer 1 w0.152: v1(24.2,23.54) 24.2,25.869 25.542,27.21 41.6,27.21 P4.3 42.73,26.741 43.2,27.21 43.616,27.21 44.079,27.674 44.079,29.916 43.195,30.8 43.079,30.8 39.8,30.8 32.2,30.8 30.279,32.721 30.279,41.316 28.597,42.997 28.516,43.079 27.884,43.079 27.803,42.997 26.879,42.074 v1(26.879,40.665)
B2-Diff1_N: P3.12 U3.14 U4.4 | length 60.1
  Top Layer w0.152: v1(19.4,37.78) 19.4,38.152 19.748,38.5 U3.14 ; U4.4 29.792,16.392 v1(29.8,16.4)
  Signal Layer 1 w0.152: P3.12 8.401,14.79 14.964,14.79 18.109,11.645 27.748,11.645 29.8,13.697 v1(29.8,16.4)
  Signal Layer 2 w0.152: v1(19.4,37.78) 20.386,36.794 20.386,21.517 21.303,20.6 27.97,20.6 28.879,19.691 28.879,17.2 29.679,16.4 v1(29.8,16.4)
B2-Diff1_P: P3.14 U3.12 U4.3 | length 63.9
  Top Layer w0.152: v1(18.455,38.627) 19.128,39.3 U3.12 ; U4.3 30.216,15.892 v1(30.329,15.779)
  Signal Layer 1 w0.152: P3.14 8.401,14.51 14.849,14.51 16.8,12.559 16.882,12.477 17.638,11.721 17.916,11.443 17.941,11.418 17.994,11.366 27.863,11.366 30.329,13.831 v1(30.329,15.779)
  Signal Layer 2 w0.152: v1(18.455,38.627) 18.897,38.185 18.897,37.571 20.107,36.362 20.107,21.401 21.187,20.321 27.854,20.321 28.6,19.575 28.6,16.533 29.355,15.779 v1(30.329,15.779)
B2-Diff2_N: P4.4 U3.3 U4.48 | length 76.8
  Top Layer w0.152: v1(18.499,44.2) 18.599,44.1 U3.3 ; U4.48 28.006,13.542 v1(28.386,13.162)
  Signal Layer 1 w0.152: v1(28.386,13.162) 28.2,13.348 28.2,16.499 29.8,18.099 33.265,18.099 34.766,19.6 46.795,19.6 47.279,20.084 47.279,24.586 46.916,24.95 46.401,24.95 P4.4
  Signal Layer 2 w0.152: v1(18.499,44.2) 18.781,44.482 25.684,44.482 26.775,45.573 38.022,45.573 44.2,39.395 44.2,27.15 P4.4
B2-Diff2_P: P4.6 U3.4 U4.45 | length 81.9
  Top Layer w0.152: v1(18.372,43.099) 18.971,42.5 18.989,42.5 18.992,42.503 19.408,42.503 19.411,42.5 U3.4 ; v1(26.4,12.2) 26.462,12.2 26.703,12.441 26.703,13.441 26.506,13.638 U4.45
  Signal Layer 1 w0.152: v1(26.4,12.2) 26.4,12.311 27.921,13.832 27.921,16.615 29.603,18.296 29.684,18.378 33.15,18.378 34.65,19.879 46.679,19.879 47,20.2 47,24.47 46.8,24.67 46.401,24.67 P4.6
  Signal Layer 2 w0.152: v1(18.372,43.099) 19.475,44.203 25.8,44.203 26.891,45.294 37.906,45.294 43.921,39.279 43.921,24.889 P4.6
B2-Diff3_N: P4.8 U3.5 U4.47 | length 78.7
  Top Layer w0.152: U3.5 22.112,42.1 v1(22.125,42.087) ; U4.47 27.506,13.217 27.6,13.123 v1(27.6,12.8)
  Signal Layer 1 w0.152: P4.8@45.27,20.74 P4.8
  Signal Layer 2 w0.152: v1(22.125,42.087) 21.638,41.6 19.724,41.6 17.079,38.955 17.079,32.323 16.27,31.513 16.27,12.93 17.2,12 22.705,12 24.502,13.797 26.603,13.797 v1(27.6,12.8) 27.6,11.44 29.44,9.6 43.6,9.6 43.921,9.921 43.921,19.516 44.003,19.597 44.275,19.87 44.8,19.87 45.27,20.34 P4.8
B2-Diff3_P: P4.10 U3.6 U4.44 | length 76.2
  Top Layer w0.152: 19.4,41.7 U3.6 ; U4.44 26.006,13.229 v1(26.087,13.148)
  Signal Layer 1 w0.152: P4.10 P4.10@45.27,18.72
  Signal Layer 2 w0.152: v1(19.2,42) 19.3,41.9 19.3,41.57 16.8,39.07 16.8,32.438 15.991,31.629 15.991,12.815 16.921,11.884 17.084,11.721 22.821,11.721 24.618,13.518 25.718,13.518 v1(26.087,13.148) 26.163,13.148 26.903,12.408 26.903,11.742 29.243,9.403 29.324,9.321 43.716,9.321 43.797,9.403 44.2,9.805 44.2,19.4 44.391,19.59 44.8,19.59 45.27,19.12 P4.10
CDONE: D5.1 R18.2 U3.45 U4.7 W1.1 W1.2 | length 70.6
  Top Layer w0.2: v1(27.885,41.173) 28.012,41.3 U3.45 ; U4.7 29.723,17.892 29.87,18.039 30.966,18.039 31.8,18.873 36.045,18.873 38.109,16.81 38.109,11.883 v1(38.6,11.391) 37.609,10.4 36.793,10.4 35.425,9.032 35.425,6.081 34.289,4.945 W1.1 W1.2 33.833,3.441 33.583,3.191 R18.2 32.241,3.191 32.191,3.241 D5.1
  Signal Layer 2 w0.2: v1(27.885,41.173) 29.712,43 31.418,43 33,41.418 33,41.385 39.727,34.658 39.727,11.704 39.414,11.391 v1(38.6,11.391)
CRESET_B: R17.1 S1.1 U3.46 U4.8 | length 60.2
  Top Layer w0.2: U4.8 30.792,18.392 31.6,19.2 36.181,19.2 38.436,16.945 38.436,14.2 39.2,13.436 v1(39.2,12.767) 39.2,10.039 38.961,9.8 37.05,9.8 36.65,9.4 R17.1 36.65,7.802 37.079,7.373 38.4,7.373 38.675,7.098 S1.1 ; U3.46 v1(31.903,41.7)
  Signal Layer 2 w0.2: v1(31.903,41.7) 39.2,34.403 v1(39.2,12.767)
Flash_MISO: P6.4 U1.2 | length 22.9
  Top Layer w0.2: P6.4 3.411,41.16 3.411,33.73 4.016,33.125 5.6,33.125 6,32.725 6,31.025 6.4,30.625 10.278,30.625 12.57,28.333 U1.2
Flash_MOSI: P6.1 U1.5 | length 14
  Top Layer w0.2: P6.1 12.871,39.939 15.031,37.778 15.031,32.569 U1.5
GND: C1.1 C2.1 C3.1 C4.1 C5.1 C6.1 C7.1 C8.1 C9.1 C10.1 C11.1 C12.1 C13.1 C14.1 C15.1 C16.1 C17.1 C18.2 C19.1 C20.1 C21.1 C22.1 C23.1 C24.1 C25.1 C26.1 D2.2 D3.2 D4.2 D5.2 J1.5 P1.3 P1.5 P1.9 P2.1 P3.18 P4.18 P5.6 S1.2 S2.2 U1.4 U2.1 U3.1 U3.2 U3.15 U3.33 U3.55 U4.EP U5.2 Y2.2 | length 17.3
  Top Layer w0.4: v1(9.8,35.95) 9.85,35.9 C2.1 ; v1(15.097,28.4) 15.11,28.387 U1.4 ; v1(17.95,29.168) C5.1 ; U3.33 31.042,35.1 v1(31.088,35.054) ; v1(31.418,16.511) 31.423,16.506 C11.1 ; U2.1 31.821,8.335 v1(31.886,8.4) ; C8.1 33.592,30.3 v1(33.946,29.945) ; v1(34.151,36.76) P1.3 ; P1.5 37.38,34.22 v1(37.4,34.2)
  Signal Layer 2 w0.4: v1(31.088,35.054) 31.088,36.943 31.418,37.273 33.638,37.273 v1(34.151,36.76)
ICS_MISO: P5.1 P6.2 U3.49 U4.14 | length 62.8
  Top Layer w0.2: U4.14 27.506,21.518 27.983,21.995 29.449,21.995 v1(29.854,22.4) ; U3.49 28.75,42.927 29.2,42.927 29.873,43.6 v1(31.2,43.6)
  Bottom Layer w0.2: P5.1 P6.2 6,41.209 6,43.308 6.318,43.626 25.919,43.626 26.545,43 30.923,43 31.2,43.277 v1(31.2,43.6) 32.325,43.6 33.077,42.847 33.077,25.623 v1(29.854,22.4)
ICS_MOSI: P5.4 P6.3 U3.10 U4.17 | length 61.9
  Top Layer w0.2: P6.3 13.003,42.479 15.382,40.1 U3.10 ; U4.17 26.006,22.069 v1(26.173,22.236)
  Signal Layer 2 w0.127: v1(21.681,37.6) 22.581,38.5 26.682,38.5 26.903,38.279 26.903,23.88 26.173,23.15 v1(26.173,22.236)
  Bottom Layer w0.2: P5.4 8.404,34.404 9,35 9,39.61 9.528,40.137 ; P6.3 8.587,42.479 8.964,42.102 8.964,40.701 9.528,40.137 ; v1(21.681,37.6) 19.143,40.137 9.528,40.137
ICS_SCK: P5.3 R11.2 U1.6 U3.13 U4.15 | length 57.7
  Top Layer w0.127: P5.3 5.008,34.404 6.228,33.184 8.117,33.184 9.963,31.337 13.6,31.337 13.83,31.567 ; U1.6 13.83,31.567 ; U3.13 21.24,38.89 19.686,38.89 18.79,37.995 17.091,37.995 16.678,37.582 16.678,31.639 16.369,31.33 14.067,31.33 13.83,31.567
  Top Layer w0.2: U1.6 13.83,33.518 14.014,33.702 R11.2 ; U4.15 27.006,21.54 27.995,22.529 v1(27.995,22.739)
  Bottom Layer w0.2: P5.3 6,33.134 17.6,33.134 v1(27.995,22.739)
ICS_SS: P5.5 R9.2 U1.1 U3.48 U4.16 | length 54.6
  Top Layer w0.2: P5.5 4.73,30.625 5.182,30.173 10.268,30.173 11.3,29.141 U1.1 R9.2 12.375,25.15 v1(12.4,25.125) ; U4.16 26.506,21.642 27.006,22.142 v1(27.006,22.725) ; U3.48 31.1,42.5 v1(31.2,42.4)
  Signal Layer 2 w0.2: v1(27.006,22.725) 29.266,24.985 29.266,41.6 30.066,42.4 v1(31.2,42.4)
  Bottom Layer w0.2: v1(12.4,25.125) 24.606,25.125 v1(27.006,22.725)
IOB_0A: P4.12 U3.7 U4.46 | length 82.2
  Top Layer w0.127: U4.46 27.006,13.724 26.99,13.724 26.988,13.726 26.988,12.667 28.263,11.391 v1(29.4,11.391)
  Top Layer w0.2: U3.7 22.014,41.3 v1(22.049,41.266)
  Signal Layer 1 w0.127: v1(22.049,41.266) 22.955,41.266 26.289,44.6 31.788,44.6 32.988,43.4 32.988,32.212 34,31.2 43.4,31.2 44.4,30.2 45.516,30.2 48,27.716 48,18.65 P4.12
  Bottom Layer w0.2: v1(29.4,11.391) 30.067,12.059 46.501,12.059 47.2,12.758 47.2,15.269 46.549,15.92 P4.12
IOB_6A: P4.14 U3.8 U4.2 | length 57.9
  Top Layer w0.2: v1@17.285,40.9 U3.8 ; U4.2 29.66,15.392 29.8,15.252 31.015,15.252 v1(31.364,15.6)
  Signal Layer 1 w0.2: v1(17.2,40.722) 17.2,38.049 v1(17.929,37.32)
  Signal Layer 2 w0.127: v1(17.929,37.32) 19.809,35.44 19.809,21.225 22.222,18.811 22.222,15.843 23.242,14.824 30.588,14.824 v1(31.364,15.6)
  Bottom Layer w0.2: v1(31.364,15.6) 31.364,15.087 31.801,14.65 44,14.65 P4.14
IOB_13B: P4.2 U3.26 U4.6 | length 53.3
  Top Layer w0.2: v1(25.778,34.009) 25.8,34.031 U3.26 ; U4.6 30.223,17.392 v1(30.273,17.442)
  Signal Layer 2 w0.127: v1(25.778,34.009) 25.778,23.348 25.429,22.998 25.429,21.928 26.156,21.2 29.066,21.2 31.2,19.066 31.2,18 30.642,17.442 v1(30.273,17.442)
  Bottom Layer w0.2: v1(30.273,17.442) 46.442,17.442 47.2,18.2 47.2,28 46.58,28.62 P4.2
IOB_16A: P4.17 U3.25 U4.9 | length 46.3
  Top Layer w0.2: U3.25 25.4,36.788 v1(25.412,36.8) ; U4.9 29.965,18.892 v1(30.107,19.034) 30.6,19.527 36.316,19.527 38.763,17.081 38.763,14.513 41.476,11.8 41.476,9.554 41.753,9.277 P4.17
  Signal Layer 2 w0.127: v1(25.412,36.8) 22.2,33.588 22.2,24.589 25.923,20.866 28.275,20.866 v1(30.107,19.034)
IOB_18A: P4.15 U3.58 U4.10 | length 72
  Top Layer w0.127: v1(35.09,28.2) 35.09,25.538 38.339,22.289 45.641,22.289 46.4,21.53 46.4,12.76 45.695,12.055 43.945,12.055 P4.15
  Top Layer w0.2: v1(24.6,40.239) U3.58 ; U4.10 29.65,19.392 30.112,19.854 36.452,19.854 39.09,17.216 39.09,14.781 42.73,11.141 P4.15
  Signal Layer 1 w0.127: v1@24.845,40.239 v1(24.6,40.239) 24.6,41.198 25.002,41.6 25.778,41.6 25.778,41.595 26.139,41.235 26.139,40.2 26.4,39.939 28.034,39.939 29.6,38.373 29.6,31.6 32.2,29 34.477,29 35.09,28.387 v1(35.09,28.2)
IOB_20A: P4.13 U3.57 U4.11 | length 61.9
  Top Layer w0.127: v1(33.915,28.188) 33.915,26.074 40.02,19.969 43.355,19.969 44.291,19.034 44.291,14.94 P4.13
  Top Layer w0.2: v1(23.8,40.795) U3.57 ; U4.11 29.6,19.892 29.889,20.181 36.722,20.181 39.417,17.487 39.417,15.106 41.143,13.38 P4.13
  Signal Layer 1 w0.127: v1(23.8,40.795) 23.8,39.6 24.4,39 27.971,39 28.889,38.083 28.889,30.311 31.371,27.829 33.557,27.829 v1(33.915,28.188)
IOB_29B: P4.9 U3.56 U4.19 | length 68.4
  Top Layer w0.2: U3.56 23,42.505 v1(23.006,42.511) ; U4.19 25.006,22.406 26.327,23.727 34.298,23.727 39.565,18.46 P4.9
  Signal Layer 2 w0.127: v1(23.006,42.511) 23.873,43.377 25.6,43.377 27.25,45.027 37.144,45.027 40.74,41.431 40.74,25.821 41.611,24.95 43.18,24.95 43.716,24.414 43.716,19.687 42.73,18.701 P4.9
IOB_31B: P4.11 U3.59 U4.18 | length 59.6
  Top Layer w0.127: v1(32.282,28.32) 32.282,26.986 39.634,19.634 43.181,19.634 44,18.815 44,17.19 P4.11@43.01,16.2
  Top Layer w0.2: v1(25.4,40.778) U3.59 ; U4.18 25.506,22.427 26.479,23.4 34.06,23.4 41.54,15.92 P4.11 P4.11@43.01,16.2
  Signal Layer 1 w0.127: v1(25.4,40.778) 25.4,39.8 25.8,39.4 28.034,39.4 29.2,38.234 29.2,31.101 31.981,28.32 v1(32.282,28.32)
IOB_41A: P3.10 U3.44 U4.28 | length 47
  Top Layer w0.152: v1(20.884,18.964) 20.955,18.892 U4.28
  Top Layer w0.2: U3.44 30.764,40.9 v1(30.794,40.871)
  Bottom Layer w0.152: P3.10 20.38,18.46 v1(20.884,18.964) 22.295,20.375 27.257,20.375 28.562,21.679 28.562,34.584 32.503,38.525 32.503,40.408 32.041,40.871 v1(30.794,40.871)
IOB_46B_G0: U4.35 Y2.3 | length 4.3
  Top Layer w0.152: Y2.3 19.956,12.964 20.084,13.092 20.084,14.358 21.117,15.392 U4.35
LED_BLUE: R14.2 U4.39 | length 17.9
  Top Layer w0.2: R14.2 10.146,9.124 11.421,10.4 21.018,10.4 23.506,12.888 U4.39
LED_GREEN: R13.2 U4.40 | length 16.4
  Top Layer w0.2: R13.2 12.2,9.104 13.072,9.976 21.086,9.976 24.006,12.895 U4.40
LED_RED: R12.2 U4.41 | length 14.6
  Top Layer w0.2: R12.2 14.2,8.714 14.979,9.494 21.067,9.494 24.506,12.933 U4.41
NetC5_2: C5.2 U3.17 Y1.2 | length 7
  Top Layer w0.147: C5.2 18.6,31.706 19.3,31.006 Y1.2 19.75,31.984 21.8,34.034 U3.17
NetC6_2: C6.2 U3.18 Y1.1 | length 6.2
  Top Layer w0.147: U3.18 22.6,32.552 22.25,32.202 Y1.1 22.5,31.006 23.2,31.706 C6.2
NetD1_2: D1.2 U4.24 | length 2.6
  Top Layer w0.2: D1.2 22.344,21.8 22.506,21.638 U4.24
NetD2_1: D2.1 R12.1 | length 1.3
  Top Layer w0.2: D2.1 14.182,5.927 R12.1
NetD3_1: D3.1 R13.1 | length 1.3
  Top Layer w0.2: D3.1 R13.1
NetD4_1: D4.1 R14.1 | length 1.3
  Top Layer w0.2: D4.1 R14.1
NetJ1_2: J1.2 R15.2 | length 2.9
  Top Layer w0.2: R15.2 23.911,7.264 24.35,6.825 J1.2
NetJ1_3: J1.3 R16.2 | length 2.9
  Top Layer w0.2: J1.3 25,6.829 25.365,7.194 R16.2
NetL1_2: L1.2 U3.31 | length 5
  Top Layer w0.2: U3.31 28.2,33.4 28.6,33 29.854,33 30.296,32.558 L1.2
NetR5_2: R5.2 U4.29 | length 3
  Top Layer w0.2: R5.2 20.065,19.392 20.257,19.2 20.257,18.766 20.605,18.419 21.779,18.419 U4.29
nRF_RST: P1.10 R19.1 S2.1 U3.40 | length 26.5
  Top Layer w0.127: U3.40 33.76,38.9 v1(34.018,38.642)
  Top Layer w0.2: v1(36.525,42.573) S2.1 36.525,44.907 36.868,45.25 R19.1 41.301,45.25 41.6,44.951 41.6,39.6 41.3,39.3 P1.10
  Bottom Layer w0.2: v1(34.018,38.642) 34.492,38.642 34.8,38.95 34.8,42.173 35.2,42.573 v1(36.525,42.573)
SWDCLK: P1.4 P2.4 U3.53 | length 37.7
  Top Layer w0.2: U3.53 32.528,44.9 37.8,39.628 37.8,35.741 37.549,35.49 P1.4 34.298,35.49 33.924,35.116 33.924,33.366 35.09,32.2 40.422,32.2 42.092,33.87 42.092,38.6 42.976,39.484 P2.4
SWDIO: P1.2 P2.3 U3.51 | length 35.4
  Top Layer w0.2: U3.51 29.677,44.127 32.839,44.127 37.4,39.565 37.4,38.37 37.059,38.03 P1.2 34,38.03 33.529,37.559 33.529,33.031 34.8,31.76 40.716,31.76 43,34.044 43,36.378 43.566,36.944 P2.3
USB_N: R15.1 U3.34 | length 34.1
  Top Layer w0.152: R15.1 23.911,9.75 24.275,10.114 v1(24.275,10.84) ; U3.34 30.026,36.1 30.287,36.36 31.343,36.36 v1(31.903,35.8)
  Bottom Layer w0.152: v1(24.275,10.84) 24.275,10.945 24.859,11.529 24.94,11.611 27.652,11.611 28.841,12.8 28.841,12.906 28.889,12.954 28.889,13.371 28.841,13.418 28.841,30.693 32,33.852 32,35.703 v1(31.903,35.8)
USB_P: R16.1 U3.35 | length 34.8
  Top Layer w0.152: v1(25.002,10.84) 25.002,10.14 25.365,9.776 R16.1 ; U3.35 30.026,36.9 30.287,36.639 32.092,36.639 v1(32.417,36.314)
  Bottom Layer w0.152: v1(25.002,10.84) 25.002,11.277 25.056,11.332 27.767,11.332 29.038,12.603 29.12,12.684 29.12,12.791 29.168,12.838 29.168,13.486 29.12,13.534 29.12,30.577 32.417,33.874 v1(32.417,36.314)
VCC: C10.2 C11.2 C12.2 R2.2 U4.5 U4.30 | length 31.4
  Top Layer w0.2: C10.2 v1(20.4,17.892) U4.30 ; U4.5 28.741,16.927 30.043,16.927 30.055,16.915 30.561,16.915 31.552,17.906 C11.2 ; R2.2 36.129,17.956 v1(36.173,18)
  Top Layer w0.4: C11.2 C12.2 33.704,17.956 R2.2
  Signal Layer 2 w0.4: v1(20.4,17.892) 20.4,16.633 22.833,14.2 34.973,14.2 36.173,15.4 v1(36.173,18)
VCC_PLL: C16.2 C17.2 R4.2 R5.1 | length 5.6
  Top Layer w0.4: R4.2 16.64,19.698 16.946,19.392 R5.1 18.044,19.442 C16.2 C17.2
VCCIO_0: C19.2 C20.2 C21.2 R6.2 U4.33 | length 7.1
  Top Layer w0.2: C19.2 19.806,15.998 20.2,16.392 U4.33
  Top Layer w0.4: R6.2 16.265,16.058 C21.2 C20.2 C19.2
VCCIO_1: C13.2 C14.2 C15.2 R3.2 U4.22 | length 8.9
  Top Layer w0.2: U4.22 23.506,24.361 23.777,24.632 C15.2
  Top Layer w0.4: C15.2 C14.2 C13.2 28.95,24.632 R3.2
VCCIO_2: C22.2 C23.2 C24.2 R7.2 U4.1 | length 8.1
  Top Layer w0.2: U4.1 31.089,14.892 31.4,14.581 32.185,14.581 C22.2
  Top Layer w0.4: C22.2 C23.2 C24.2 36.55,14.598 R7.2
VDDH: C9.2 R1.1 U3.30 | length 5.1
  Top Layer w0.2: U3.30 27.4,32.927 27.15,32.677 C9.2 28.646,31.7 R1.1
VUSB: C3.2 C8.2 C25.2 J1.1 U2.3 U3.32 U5.1 U5.3 | length 102.2
  Top Layer w0.2: U3.32 29,33.902 29.2,33.702 31.298,33.702 31.95,33.05 C8.2
  Top Layer w0.4: U5.3 18.2,4.535 18.2,5.538 18.11,5.628 16.379,5.628 16.224,5.473 U5.1 16.224,3.431 16.379,3.276 C25.2 16.379,1.342 16.579,1.142 19.046,1.142 19.75,1.846 19.75,6.158 20.319,6.727 v1(22.226,6.727) 23.4,6.727 23.7,6.427 J1.1 23.7,3.617 v1(23.683,3.6) ; v1(26.6,9.207) 26.602,9.204 C3.2 28.061,9.204 28.697,8.569 U2.3 ; C8.2 34.082,31.7 35.304,30.478 46.664,30.478 47.942,29.2 47.942,9.982 46.789,8.829 46.789,7.656 46.12,6.986 41.986,6.986 38.615,3.615 v1(36.8,3.615)
  Bottom Layer w0.4: v1(22.226,6.727) 26.327,6.727 26.6,7 v1(26.6,9.207) ; v1(23.683,3.6) 36.785,3.6 v1(36.8,3.615)
pads on no net: ?. ?.1 J1. J1.4 P1.6 P1.7 P1.8 S1. S2. U3.16 U3.19 U3.36 U3.37 U3.39 U3.43 U3.52 U3.54 U5.4

## Polygon pours and split planes (outlines as drawn)
GND on Bottom Layer "GND_L04_P002" (solid, pour order 2): 0,48 cw(c2,48) 2,50 15,50 15,46 35,46 35,50 48,50 cw(c48,48) 50,48 50,2 cw(c48,2) 48,0 2,0 cw(c2,2) 0,2
GND on Top Layer "GND_L01_P004" (solid, pour order 4): 0,48 cw(c2,48) 2,50 15,50 15,46 21,46 21,44.125 28.4,44.125 28.4,46 35,46 35,50 48,50 cw(c48,48) 50,48 50,2 cw(c48,2) 48,0 2,0 cw(c2,2) 0,2
+3.3V on Signal Layer 2 "+3.3V_L03_P006" (solid, pour order 6): 0,48 cw(c2,48) 2,50 15,50 15,46 35,46 35,50 48,50 cw(c48,48) 50,48 50,2 cw(c48,2) 48,0 2,0 cw(c2,2) 0,2
GND on Signal Layer 1 "GND_L02_P008" (solid, pour order 8): 0,48 cw(c2,48) 2,50 15,50 15,46 35,46 35,50 48,50 cw(c48,48) 50,48 50,2 cw(c48,2) 48,0 2,0 cw(c2,2) 0,2

## Keep-outs
Keep-Out Layer:
  the board outline again, w0.127

## Other copper
Top Layer:
  text "L1" at 7,2.073 h0.8
Signal Layer 1:
  text "L2" at 7,2.073 h0.8
Signal Layer 2:
  text "L3" at 7,2.073 h0.8
Bottom Layer:
  text "L4" at 7,2.073 h0.8

## Silkscreen, mask and mechanical layers (free items; w line width, h text height)
Top Overlay:
  lines w0.254: 3,38.8 3,43.6 3.2,43.6 3.2,38.8 3,38.8 ; 8.8,38.8 9,38.8 9,43.6 8.8,43.6 8.8,38.8
  lines w0.4: 2.6,28.2 3,28.6 2.6,29 2.6,28.2 ; 2.6,36.6 2.6,37.4 3,37 2.6,36.6 ; 33.4,38.8 33.8,39.2 33.4,39.6 33.4,38.8 ; 40.6,28.22 41,28.62 40.6,29.02 40.6,28.22 ; 43,31.42 43,32.22 43.4,31.82 43,31.42
  text "Edgy" at 7.27,45.8 h5
Bottom Overlay:
  drawing of 3052 lines, arcs and shapes, not listed
  text "Ver 0.1" at 15,1.2 h2
  text "electronut.in" at 43.6,1.2 h2.5
Mechanical 1:
  the board outline again, w0.127